# Altium PCB MB1137.PcbDoc (part 1 of 4)
Units mil, origin at the board's own origin, x right, y up, seen from the top; angles counter-clockwise.
Board outline 2760.94 x 5254.68 mil, 6 copper layers (Top Layer, GND, Signal, PWR, GND (Mid2), Bottom Layer), stack 74.545 mil thick; 293 components, 281 nets, 1134 pads, 921 vias.
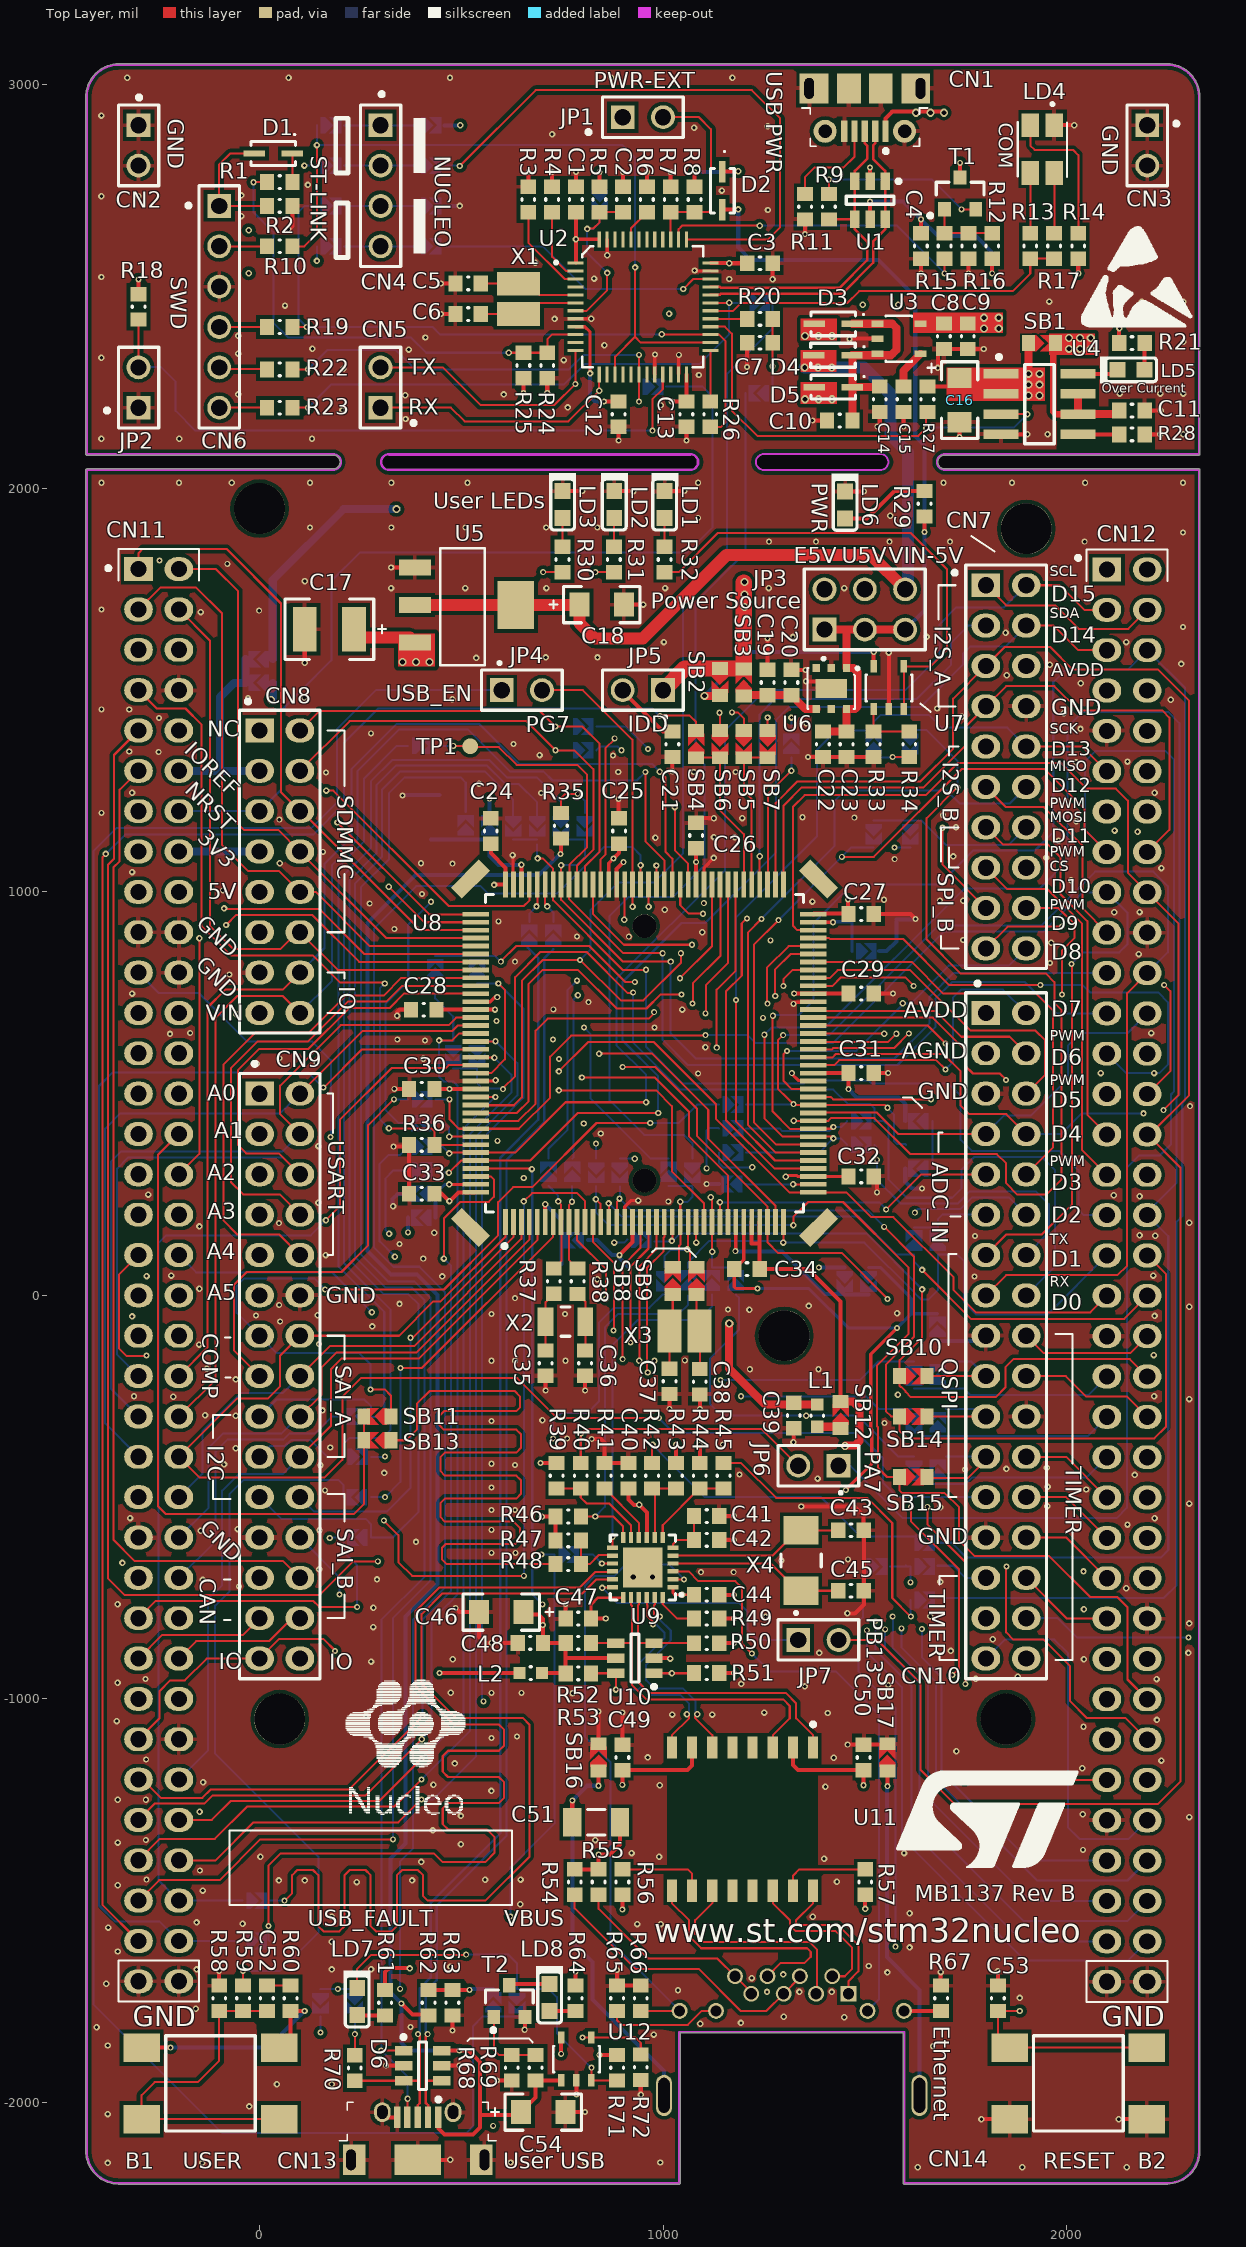
[diagram p0: Top Layer view]
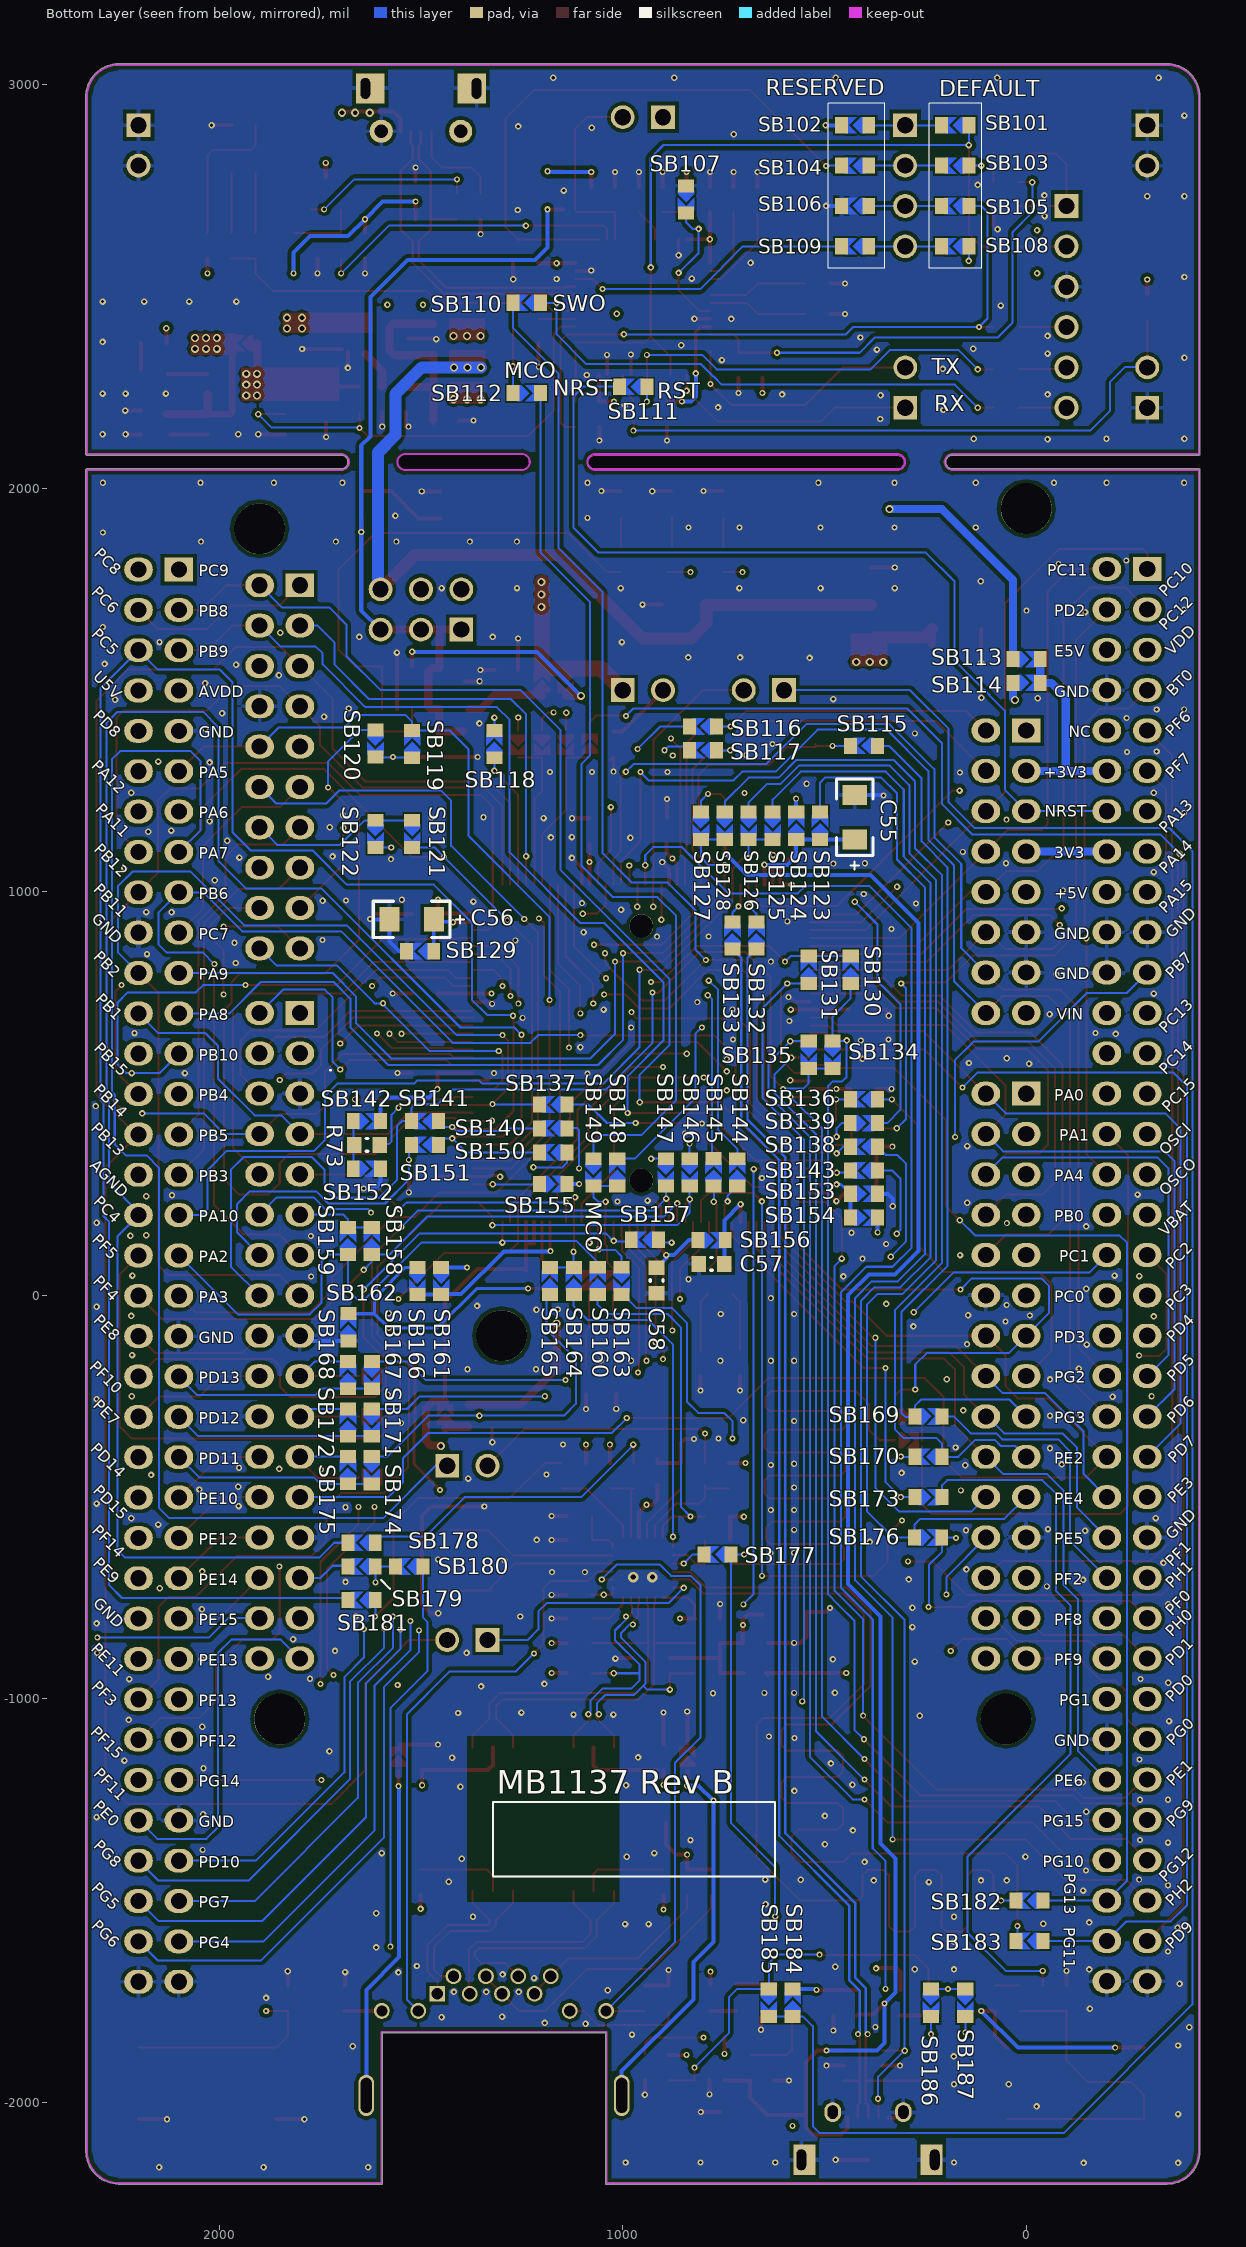
[diagram p1: Bottom Layer view, seen from below]
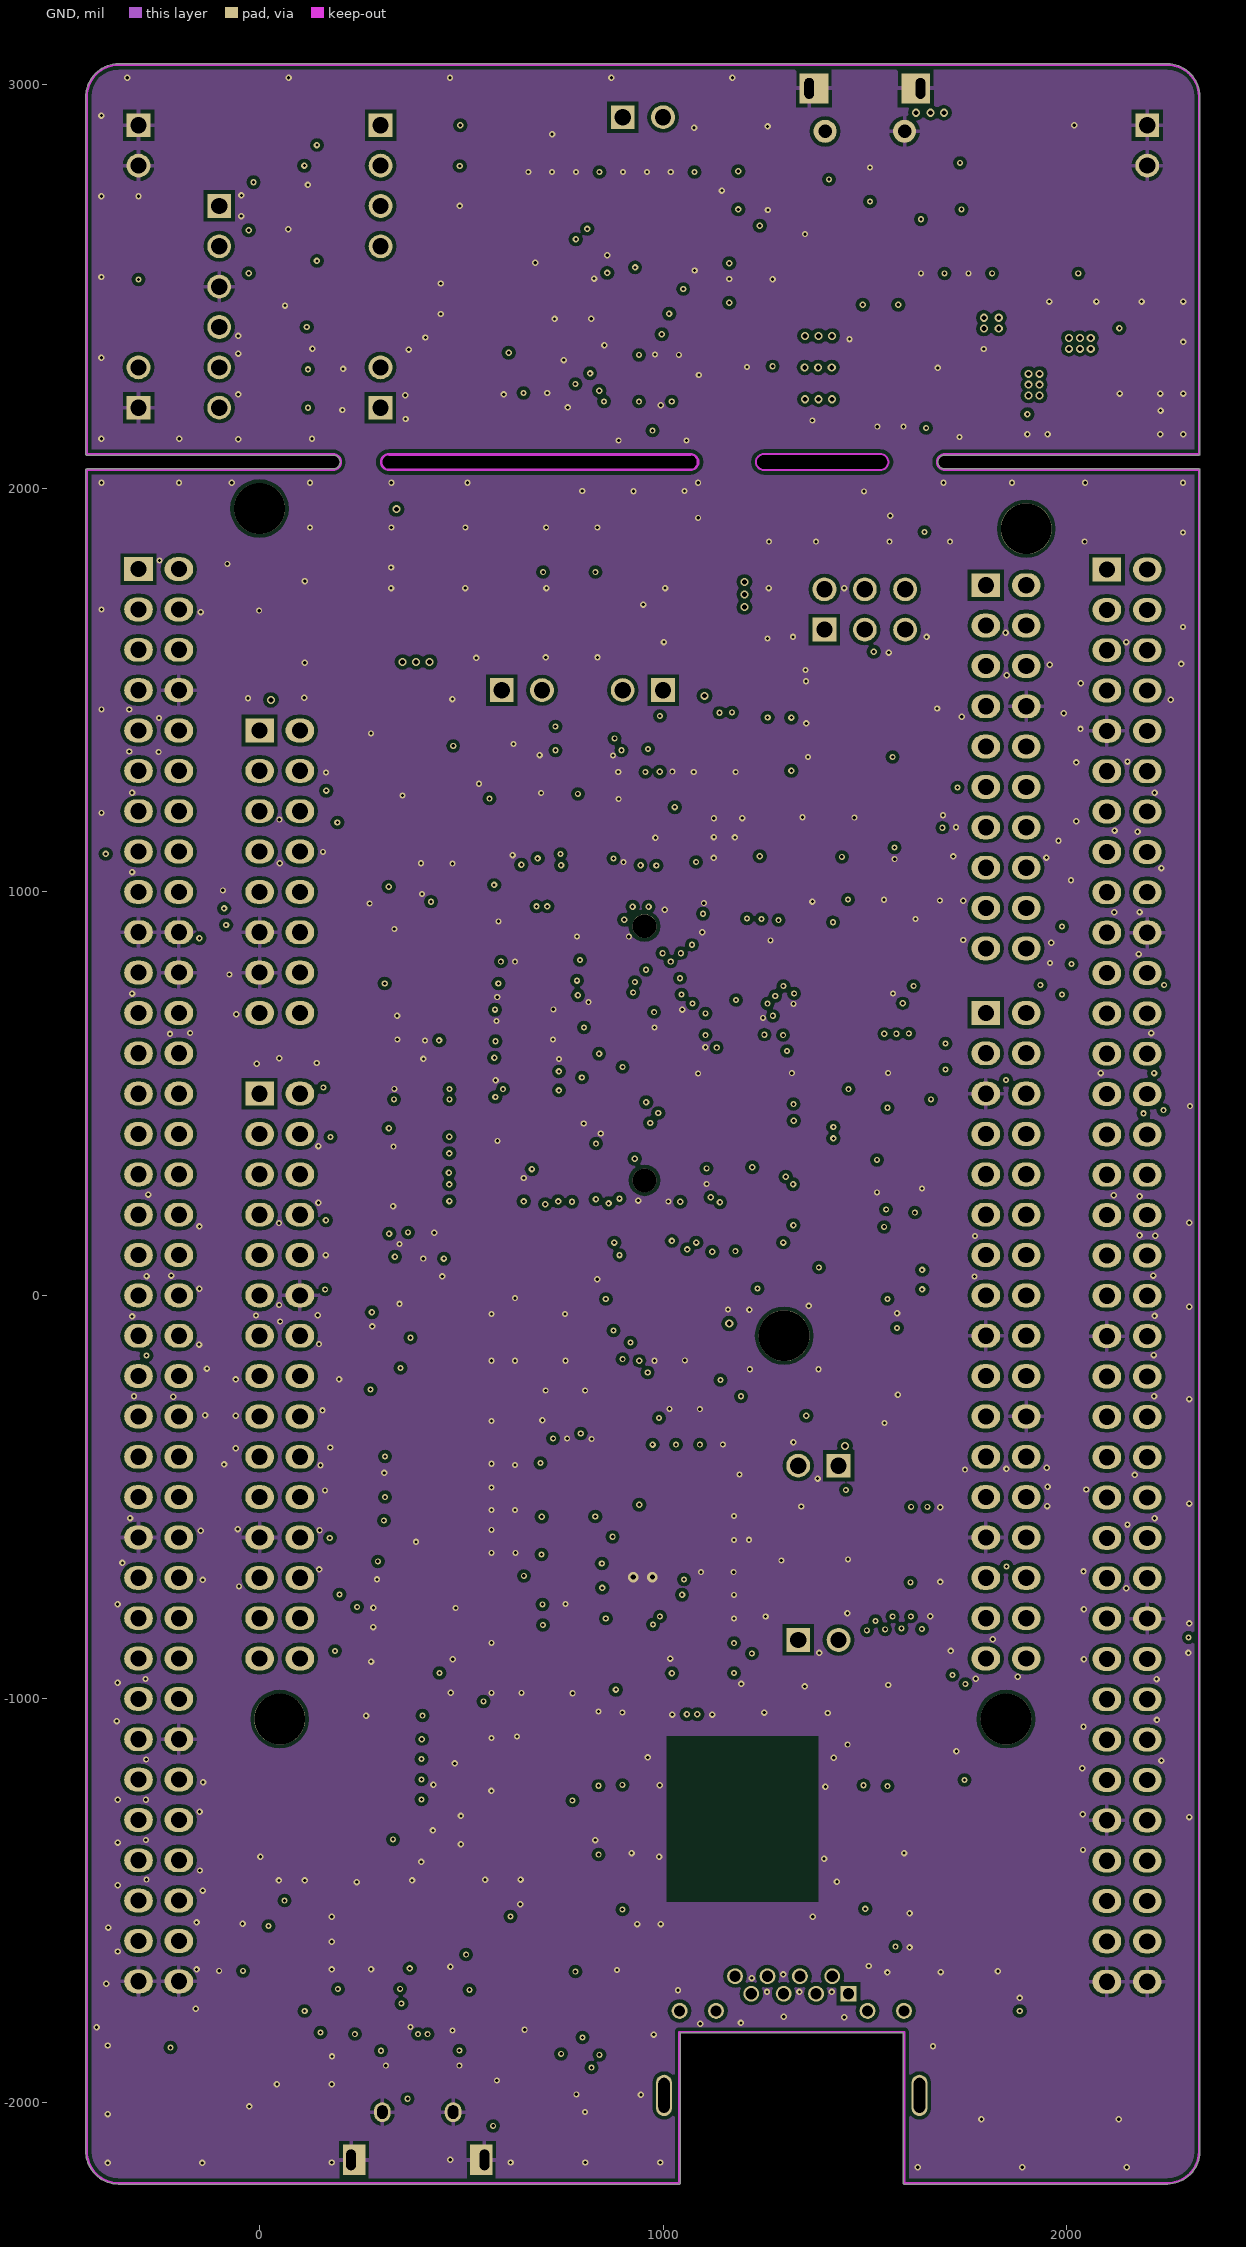
[diagram p2: GND]
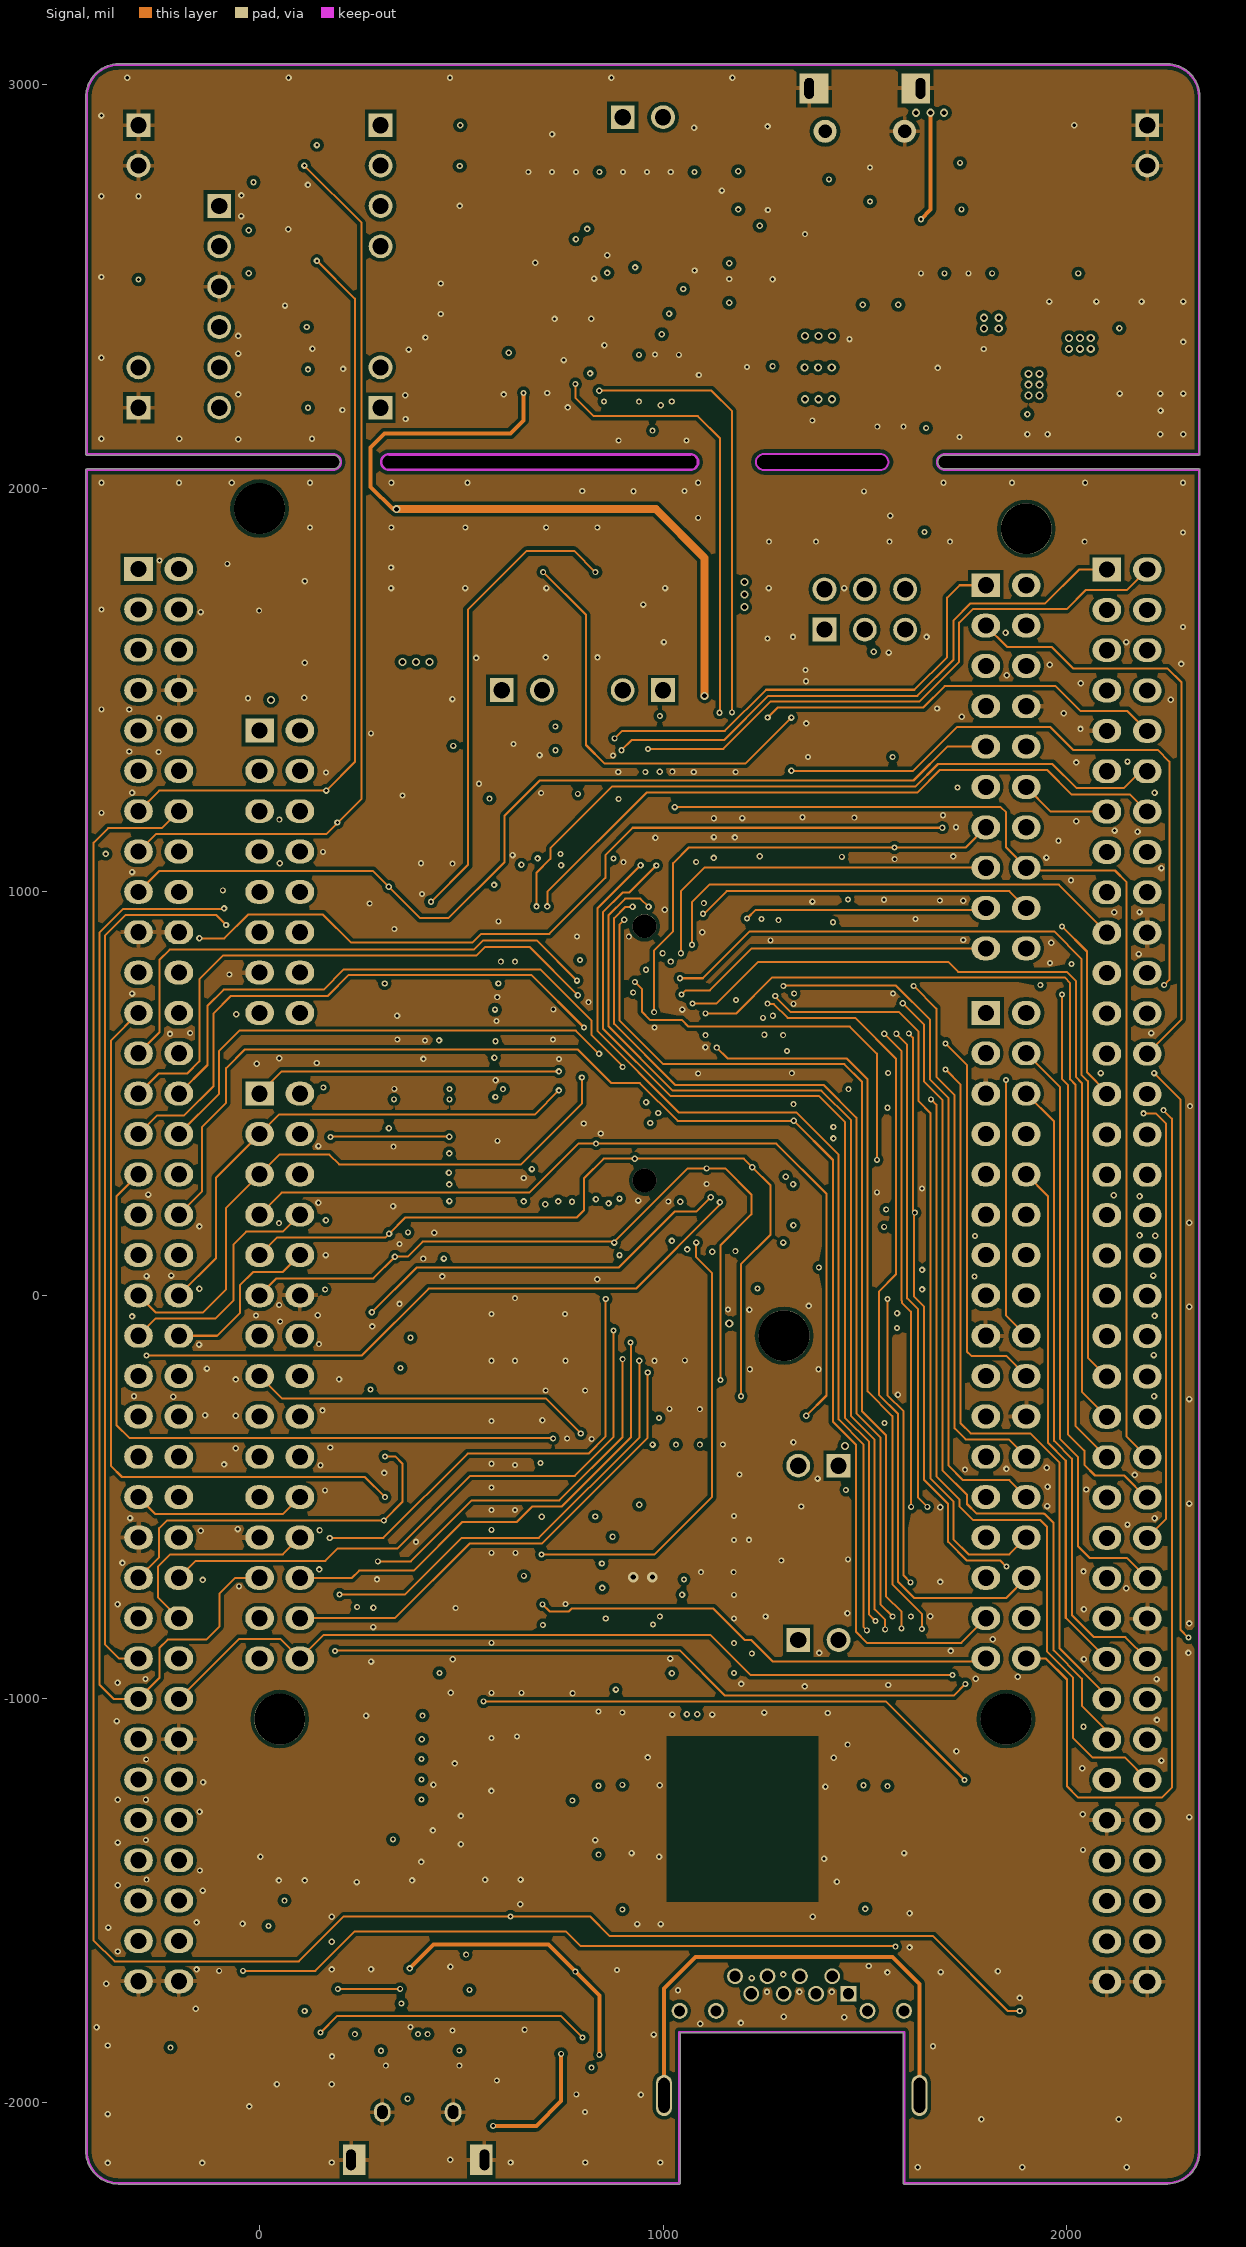
[diagram p3: Signal]
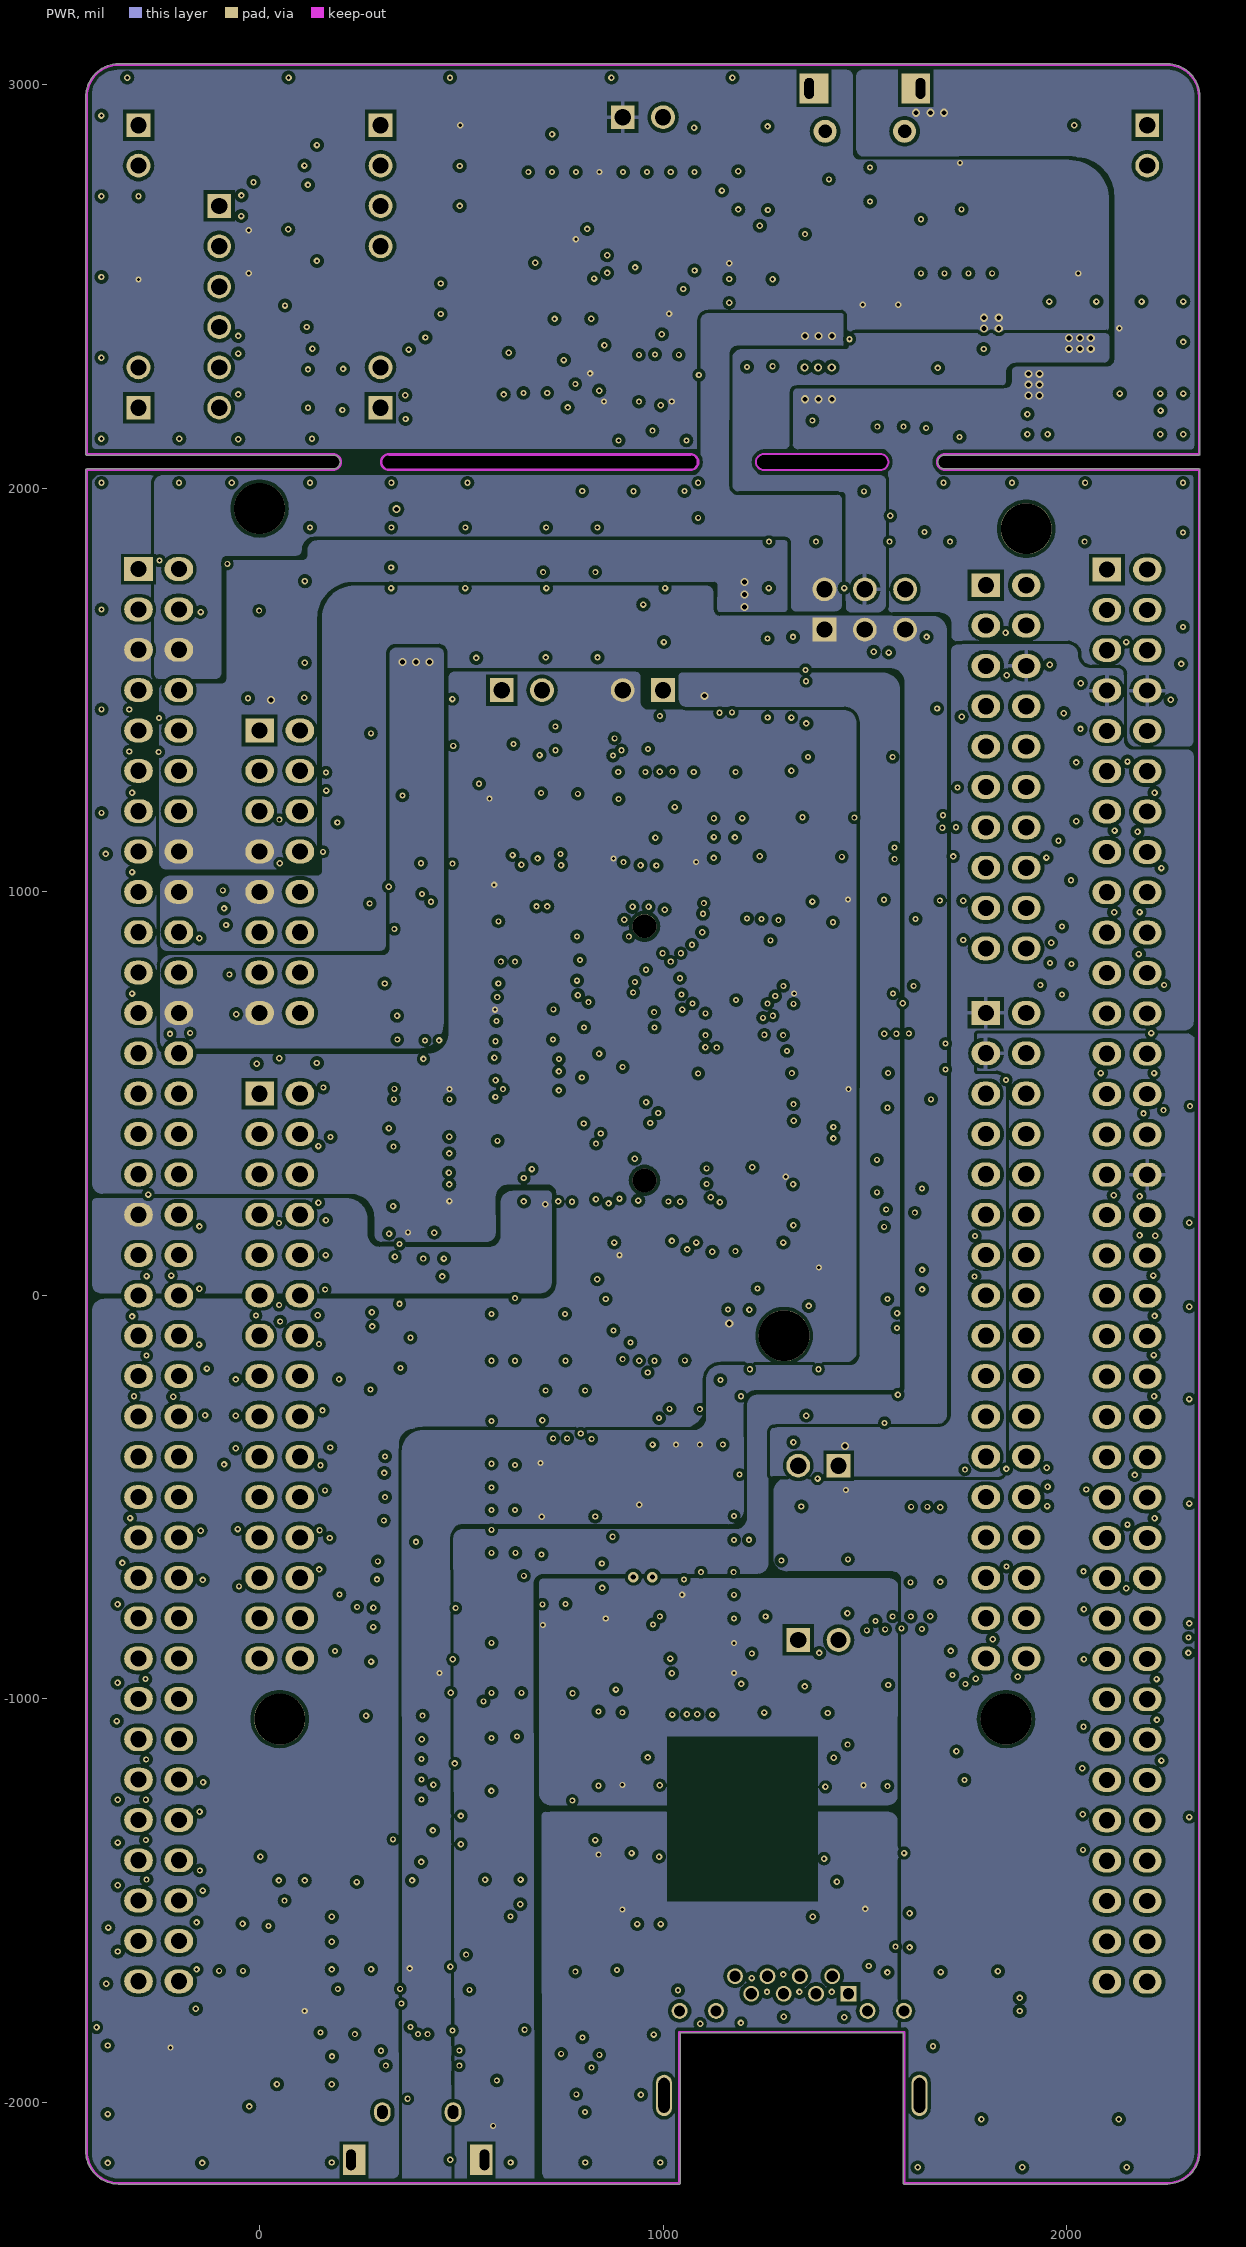
[diagram p4: PWR]
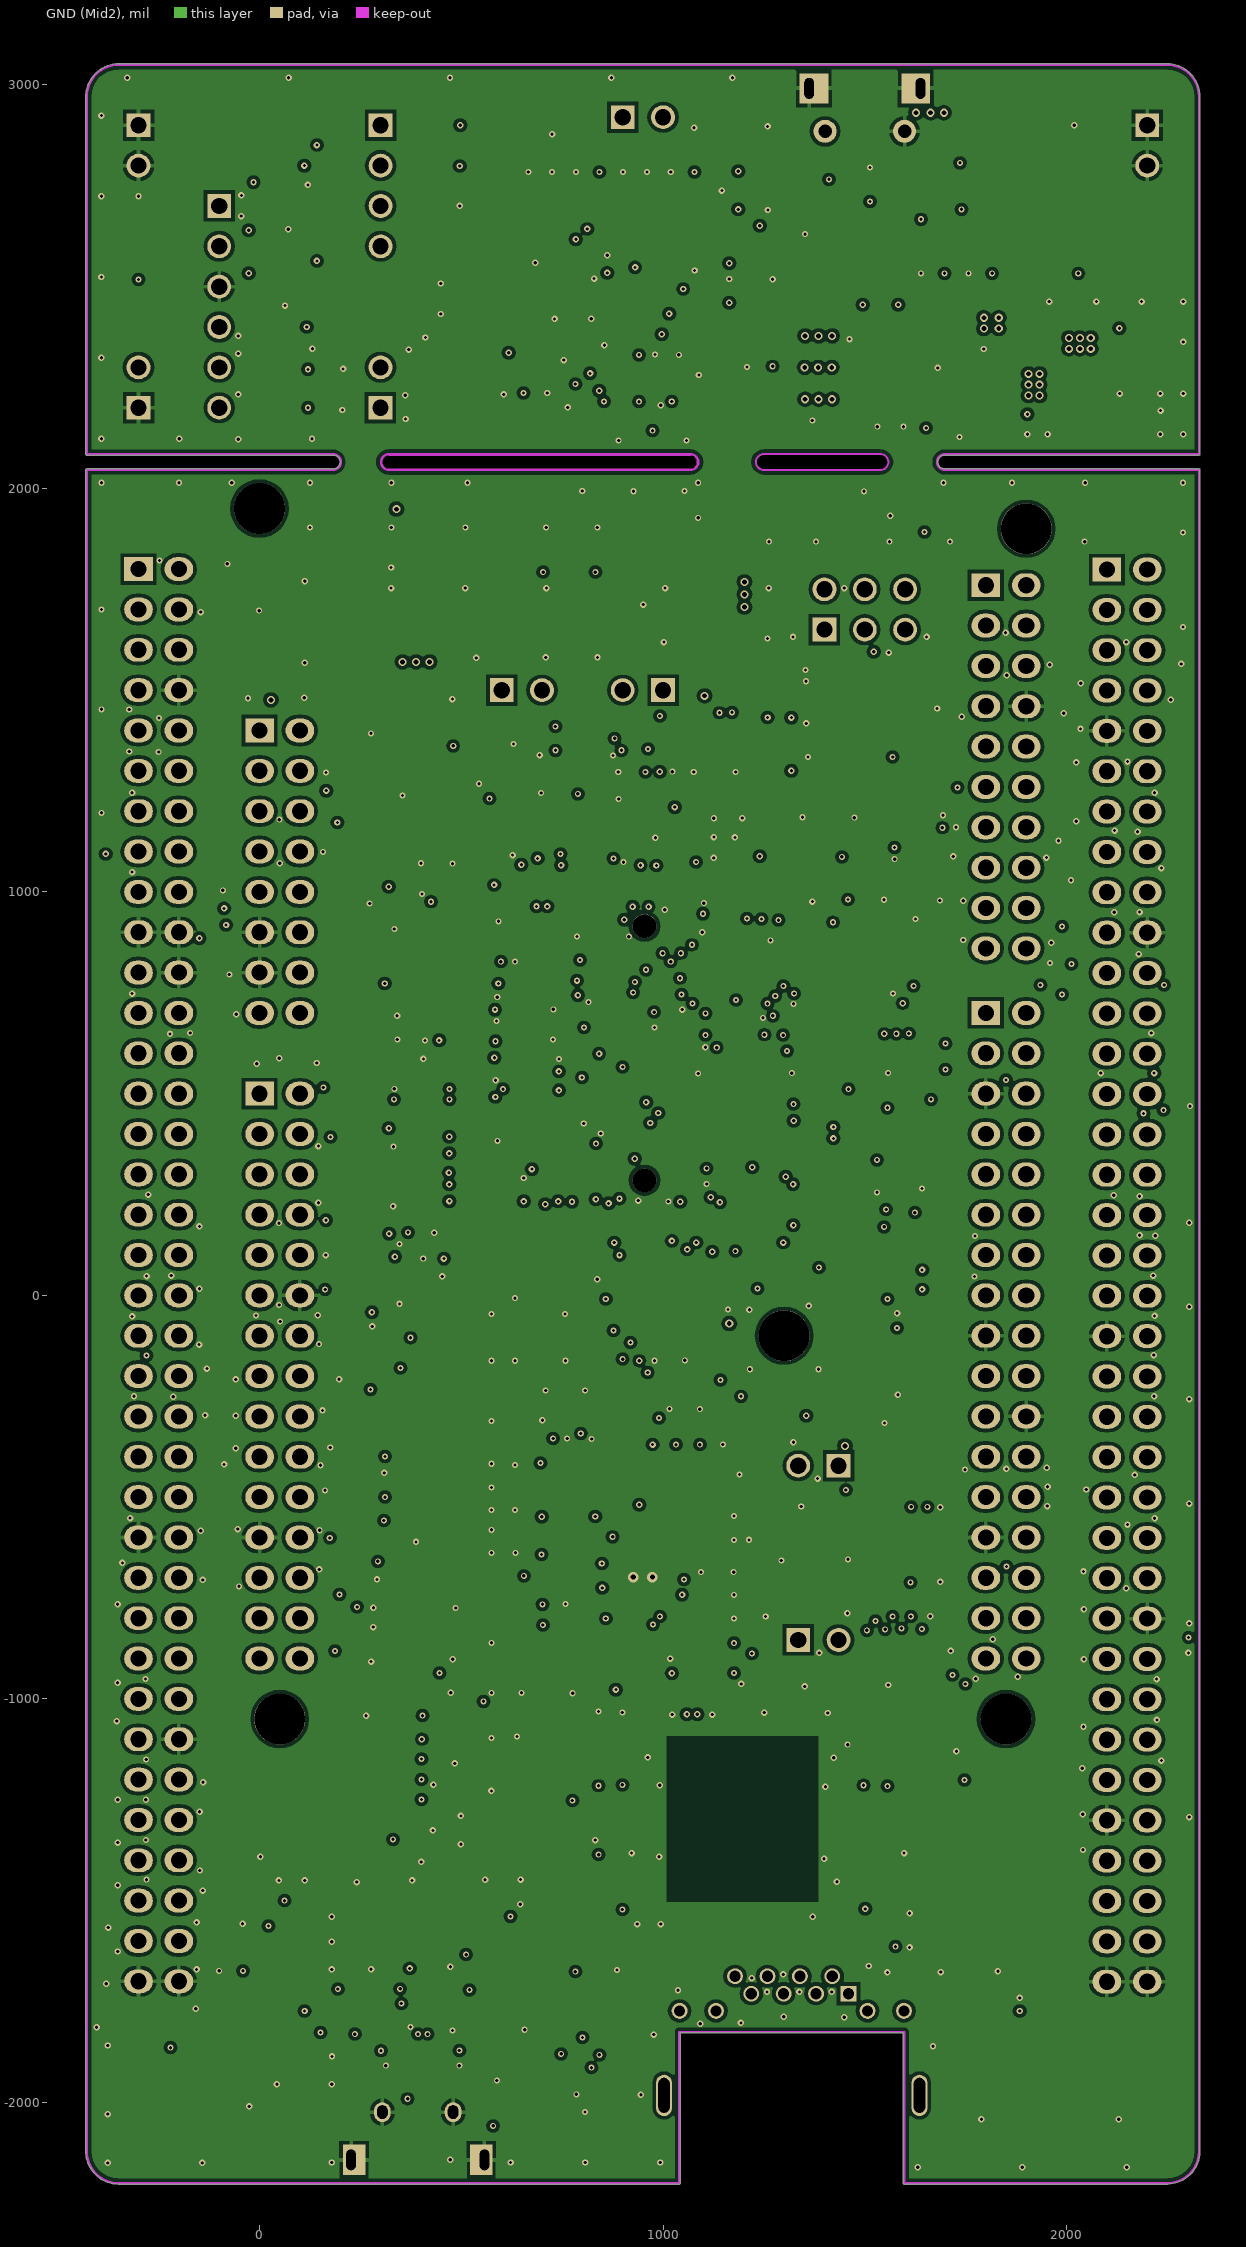
[diagram p5: GND (Mid2)]

## Layer stack, top to bottom
Top Layer: signal copper 1.4
Dielectric: core 15.748, FR-4, Dk 4.8
GND: signal copper 1.4
Dielectric: prepreg 9.4488, FR-4, Dk 4.8
Signal: signal copper 1.4
Dielectric: core 12.6, FR-4, Dk 4.8
PWR: signal copper 1.4
Dielectric: prepreg 12.6, FR-4, Dk 4.8
GND (Mid2): signal copper 1.4
Dielectric: core 15.748, FR-4, Dk 4.8
Bottom Layer: signal copper 1.4

## Board outline
-430.47,-2121.26 ccw(c-349.21,-2121.26) -349.85,-2202.51 ccw(c-349.37,-2200.04) -349.37,-2202.56 1040,-2202.56 ccw(c1040,-2200.04) 1042.52,-2200.04 1042.52,-1827.67 1595.49,-1827.67 1595.49,-2200.02 ccw(c1598,-2200.04) 1598,-2202.56 2249.06,-2202.56 ccw(c2249.06,-2200.04) 2250.06,-2202.35 ccw(c2249.06,-2121.1) 2330.31,-2122.14 ccw(c2327.95,-2121.26) 2330.47,-2121.26 2330.47,2045.67 ccw(c2327.95,2045.67) 2327.95,2048.18 1698.03,2048.18 cw(c1698.03,2045.67) 1698.05,2048.18 1698.03,2048.18 cw(c1698.03,2065.35) 1698.03,2082.52 2327.93,2082.52 ccw(c2327.95,2085.04) 2330.47,2085.04 2330.47,2970.87 ccw(c2327.95,2970.87) 2330.47,2970.89 cw(c2249.21,2970.87) 2330.47,2970.87 2330.47,2970.89 ccw(c2249.21,2970.87) 2249.24,3052.12 ccw(c2249.21,2970.87) 2249.21,3052.12 cw(c2249.21,3049.61) 2249.24,3052.12 2249.21,3052.12 -349.21,3052.12 ccw(c-349.21,3049.61) -349.24,3052.12 cw(c-349.21,2970.87) -349.21,3052.12 -349.24,3052.12 ccw(c-349.21,2970.87) -430.47,2970.87 -430.47,2085.04 ccw(c-427.95,2085.04) -427.95,2082.52 182.28,2082.52 cw(c182.28,2085.04) 182.26,2082.52 182.28,2082.52 cw(c182.28,2065.35) 199.45,2065.35 cw(c182.28,2065.35) 182.28,2048.18 -427.95,2048.18 ccw(c-427.95,2045.67) -430.47,2045.67
cut-out: 320.08,2048.18 320.1,2048.18 569.42,2048.18 1068.11,2048.18 cw(c1068.11,2045.67) 1068.13,2048.18 ccw(c1068.11,2065.35) 1085.28,2065.35 ccw(c1068.11,2065.35) 1068.11,2082.52 cw(c1068.11,2085.04) 1068.08,2082.52 1068.11,2082.52 569.42,2082.52 1068.08,2082.52 569.42,2082.52 320.08,2082.52 ccw(c320.08,2085.04) 320.1,2082.52 320.08,2082.52 569.42,2082.52 320.08,2082.52 ccw(c320.08,2065.35)
cut-out: 1250,2045.67 cw(c1250,2065.35) 1250,2085.04 1538.58,2085.04 cw(c1538.58,2065.35) 1538.58,2045.67

## Design rules (kind name [scope] priority, off if disabled: settings)
Clearance "U9 PWR TRACK" [(ObjectKind = 'Track') vs (ObjectKind = 'Pad') And (Component = 'U9')] p1: gap=8
Clearance "U8 PWR TRACK" [(ObjectKind = 'Track') vs (ObjectKind = 'Pad') And (Component = 'U8')] p2: gap=8
Clearance SB [(HasFootprint('SB_0603')) or (HasFootprint('JP2_SMD'))] p3: gap=5
Clearance CN1_PAD [(ObjectKind = 'Pad') And (Component = 'CN1') vs (ObjectKind = 'Pad') And (Component = 'CN1')] p4: gap=8
Clearance U6_PAD [(ObjectKind = 'Pad') And (Component = 'D6') vs (ObjectKind = 'Pad') And (Component = 'D6')] p5: gap=8
Clearance CN13_PAD [(ObjectKind = 'Pad') And (Component = 'CN13') vs (ObjectKind = 'Pad') And (Component = 'CN13')] p6: gap=7
Clearance U9_PAD [(ObjectKind = 'Pad') And (Component = 'U9') vs (ObjectKind = 'Pad') And (Component = 'U9')] p7: gap=8
Clearance U8_PAD [(ObjectKind = 'Pad') And (Component = 'U8') vs (ObjectKind = 'Pad') And (Component = 'U8')] p8: gap=7.8
Clearance Polygon [(ObjectKind = 'Poly')] p9: gap=10
Clearance [All] p10: gap=8.9
DiffPairsRouting [All] p1: maxlimit=10 minlimit=8.9 mostfreqgap=8.9 maxuncoupledlength=500
FabricationTestPointUsage TestPointUsage [All] p1: valid=0 allowmultiple=FALSE
FabricationTestpoint Testpoint [(IsPad And (OnTopLayer Or OnBottomLayer))] p1: side=3 testpointundercomponent=TRUE minsize=40 maxsize=100 preferedsize=60 minholesize=0 maxholesize=40 preferedholesize=32 testpointgrid=1 allowsidetop=TRUE allowsidebottom=TRUE usegrid=TRUE gridtolerance=0.01
HoleSize [All] p1: absolutevalues=TRUE maxlimit=150 minlimit=1 maxpercent=80.000 minpercent=20.000
MatchedLengths "Schematic Matched Net Lengths_3" [InNet('TD_P')] p1: tolerance=100 checknetsindiffpair=TRUE checkdiffpairvsdiffpair=TRUE checkothers=TRUE
MatchedLengths "Schematic Matched Net Lengths_2" [InNet('TD_N')] p2: tolerance=100 checknetsindiffpair=TRUE checkdiffpairvsdiffpair=TRUE checkothers=TRUE
MatchedLengths "Schematic Matched Net Lengths_1" [InNet('RD_P')] p3: tolerance=100 checknetsindiffpair=TRUE checkdiffpairvsdiffpair=TRUE checkothers=TRUE
MatchedLengths "Schematic Matched Net Lengths" [InNet('RD_N')] p4: tolerance=100 checknetsindiffpair=TRUE checkdiffpairvsdiffpair=TRUE checkothers=TRUE
MinimumSolderMaskSliver [All] p1: minsoldermaskwidth=0.5
PolygonConnect VBAT [(ObjectKind = 'Poly') And (Net = 'VBAT')] p1: connectstyle=Direct reliefconductorwidth=10 reliefentries=4 polygonreliefangle="90 Angle"
PolygonConnect VDD [(ObjectKind = 'Poly') And (Net = 'VDD')] p2: connectstyle=Direct reliefconductorwidth=10 reliefentries=4 polygonreliefangle="90 Angle"
PolygonConnect VIN [(ObjectKind = 'Poly') And (Net = 'VIN')] p3: connectstyle=Direct reliefconductorwidth=10 reliefentries=4 polygonreliefangle="90 Angle"
PolygonConnect +3V3 [(ObjectKind = 'Poly') And (Net = '+3V3')] p4: connectstyle=Direct reliefconductorwidth=10 reliefentries=4 polygonreliefangle="90 Angle"
PolygonConnect E5V [(ObjectKind = 'Poly') And (Net = 'E5V')] p5: connectstyle=Direct reliefconductorwidth=10 reliefentries=4 polygonreliefangle="90 Angle"
PolygonConnect +5V [(ObjectKind = 'Poly') And (Net = '+5V')] p6: connectstyle=Direct reliefconductorwidth=10 reliefentries=4 polygonreliefangle="90 Angle"
PolygonConnect U5V [(ObjectKind = 'Poly') And (Net = 'NetC17_2')] p7: connectstyle=Direct reliefconductorwidth=10 reliefentries=4 polygonreliefangle="90 Angle"
PolygonConnect VIA [IsVia] p8: connectstyle=Direct reliefconductorwidth=20 reliefentries=4 polygonreliefangle="90 Angle"
PolygonConnect [All] p9: connectstyle=Relief reliefconductorwidth=10 reliefentries=4 polygonreliefangle="90 Angle"
RoutingLayers [All] p1: top layer_v5=FALSE mid layer 1_v5=FALSE mid layer 2_v5=FALSE mid layer 3_v5=FALSE mid layer 4_v5=FALSE bottom layer_v5=FALSE
RoutingVias [All] p1: holewidth=12 width=20 viastyle="Through Hole" minholewidth=8 minwidth=15 maxholewidth=28 maxwidth=50
SilkToSilkClearance [All] p1: silktosilkclearance=4
SilkscreenOverComponentPads [IsPad] p1: minsilkscreentomaskgap=4
SolderMaskExpansion [All] p1: expansion=4
Width PWR [InNetClass('PWR')] p1: maxlimit=100 minlimit=8 preferedwidth=10 midlayer1_minwidth=10 midlayer2_minwidth=10 midlayer3_minwidth=10 midlayer4_minwidth=10 bottomlayer_minwidth=10 minimp=50.000000 maximp=50.000000 favimp=50.000000
Width [All] p2: maxlimit=100 minlimit=5 preferedwidth=5 minimp=50.000000 maximp=50.000000 favimp=50.000000
20 further rules are at their usual default settings.

## Classes and differential pairs
component class U_USB: C54 CN13 D6 LD7 LD8 R61 R62 R63 R64 R68 R69 R70 R71 R72 R76 SB184 SB185 SB186 SB187 T2 U12
component class U_Ethernet: C40 C41 C42 C43 C44 C45 C46 C47 C48 C49 C50 C51 CN14 L2 R39 R40 R41 R42 R43 R44 R45 R46 R47 R48 R49 R50 R51 R52 R53 R54 R55 R56 R57 R65 R66 R67 SB16 SB17 SB177 U9 U10 U11 X4
component class U_MCU_144: B1 B2 C21 C24 C25 C26 C27 C28 C29 C30 C31 C32 C33 C34 C35 C36 C37 C38 C39 C52 C53 C55 C56 C57 C58 JP4 JP6 JP7 L1 LD2 LD3 R30 R31 R35 R36 R37 R38 R58 R59 R60 R73 SB5 SB6 SB8 SB9 SB12 SB13 SB118 SB123 SB124 SB125 SB127 SB129 SB132 SB133 SB139 SB142 SB149 SB152 SB153 SB154 SB155 SB156 SB160 SB161 SB162 SB164 SB166 SB173 SB178 SB180 SB181 SB182 SB183 TP1 U8 X2 X3
component class MB1137: C11 C16 C17 C18 C19 C20 C22 C23 JP3 JP5 LD5 LD6 R21 R27 R28 R29 SB1 SB2 SB3 U4 U5 U6
net class PH[0..2]: PH0 PH1 PH2
net class PG[0..15]: PG0 PG1 PG2 PG3 PG4 PG5 PG6 PG7 PG8 PG9 PG10 PG11 PG12 PG13 PG14 PG15
net class PF[0..15]: PF0 PF1 PF2 PF3 PF4 PF5 PF6 PF7 PF8 PF9 PF10 PF11 PF12 PF13 PF14 PF15
net class PE[0..15]: PE0 PE1 PE2 PE3 PE4 PE5 PE6 PE7 PE8 PE9 PE10 PE11 PE12 PE13 PE14 PE15
net class PD[0..15]: PD0 PD1 PD2 PD3 PD4 PD5 PD6 PD7 PD8 PD9 PD10 PD11 PD12 PD13 PD14 PD15
net class PA[0..15]: PA0 PA1 PA2 PA3 PA4 PA5 PA6 PA7 PA8 PA9 PA10 PA11 PA12 PA13 PA14 PA15
net class PB[0..15]: PB0 PB1 PB2 PB3 PB4 PB5 PB6 PB7 PB8 PB9 PB10 PB11 PB12 PB13 PB14 PB15
net class PC[0..15]: PC0 PC1 PC2 PC3 PC4 PC5 PC6 PC7 PC8 PC9 PC10 PC11 PC12 PC13 PC14 PC15
component class U_ST_LINK_V2-1: C1 C2 C3 C4 C5 C6 C7 C8 C9 C10 C12 C13 C14 C15 CN1 CN2 CN3 CN4 CN5 CN6 D1 D2 D3 D4 D5 JP1 JP2 LD4 R1 R2 R3 R4 R5 R6 R7 R8 R9 R10 R11 R12 R13 R14 R15 R16 R17 R18 R19 R20 R22 R23 R24 R25 R26 SB101 SB102 SB103 SB104 SB105 SB106 SB107 SB108 SB109 SB110 SB111 SB112 T1 U1 U2 U3 X1
component class U_Connectors: CN7 CN8 CN9 CN10 CN11 CN12 LD1 R32 R33 R34 SB4 SB7 SB10 SB11 SB14 SB15 SB113 SB114 SB115 SB116 SB117 SB119 SB120 SB121 SB122 SB126 SB128 SB130 SB131 SB134 SB135 SB136 SB137 SB138 SB140 SB141 SB143 SB144 SB145 SB146 SB147 SB148 SB150 SB151 SB157 SB158 SB159 SB163 SB165 SB167 SB168 SB169 SB170 SB171 SB172 SB174 SB175 SB176 SB179 U7
differential pair TD: +TD_P -TD_N
differential pair RD: +RD_P -RD_N
differential pair NewDifferentialPair1: +NetCN13_3 -NetCN12_2
differential pair NewDifferentialPair2: +NetCN13_2 -NetCN13_3

## Components (designator, comment, footprint, x,y, rotation, side; value= is the part's Value field where it differs from the comment)
B1 "USER (Blue)" PB-6X6mm-Blue -122,-1953 r180 top
B2 "TD-0341 [RESET/Black]" PB-6X6mm-Black 2029,-1953 r180 top
C1 "100nF" 0603C 784,2716 r270 top
C2 "100nF" 0603C 901,2716 r270 top
C3 "100nF" 0603C 1240,2558 r180 top
C4 "100nF" 0603C 1639,2601 r90 top
C5 "10pF" 0603C 517,2508 r180 top
C6 "10pF" 0603C 517,2432 r180 top
C7 "20pF[N/A]" 0603C 1240,2361 r180 top
C8 "100nF" 0603C 1696,2377 r90 top locked
C9 "1uF_X5R_0603" 0603C 1755,2377 r270 top
C10 "100nF" 0603C 1438,2168 r0 top
C11 "100nF" 0603C 2162,2193 r180 top
C12 "100nF" 0603C 890,2184 r90 top
C13 "100nF" 0603C 1058,2184 r90 top
C14 "1uF_X5R_0603" 0603C 1537,2221 r90 top
C15 "10nF_X7R_0603" 0603C 1596,2221 r90 top
C16 "4.7uF" TAN-A 1735,2219 r90 top
C17 "10uF(25V)" TAN-B 173,1651 r0 top
C18 "10uF" TAN-A 848,1712 r180 top
C19 "100nF" 0603C 1259,1519 r270 top
C20 "1uF_X5R_0603" 0603C 1318,1519 r90 top
C21 "4.7uF_X5R_0603" 0603C 1023,1366 r270 top
C22 "100nF" 0603C 1396,1366 r90 top
C23 "1uF_X5R_0603" 0603C 1455,1366 r270 top
C24 "100nF" 0603C 573,1151 r90 top
C25 "100nF" 0603C 891,1151 r90 top
C26 "100nF" 0603C 1082,1140 r90 top
C27 "100nF" 0603C 1491,945 r0 top
C28 "100nF" 0603C 407,708 r180 top
C29 "100nF" 0603C 1491,748 r0 top
C30 "100nF" 0603C 402,512 r180 top
C31 "100nF" 0603C 1491,551 r0 top
C32 "100nF" 0603C 1491,295 r0 top
C33 "100nF" 0603C 402,252 r180 top
C34 "100nF" 0603C 1208,65 r180 top
C35 "2pF" 0603C 709,-168 r270 top
C36 "2pF" 0603C 807,-168 r270 top
C37 "4.3pF[N/A]" 0603C 1016,-213 r270 top
C38 "4.3pF[N/A]" 0603C 1091,-214 r270 top
C39 "100nF" 0603C 1324,-297.4 r270 top
C40 "100nF" 0603C 914,-447 r270 top
C41 "1uF_X5R_0603" 0603C 1108,-547 r0 top
C42 "470pF" 0603C 1108,-606 r180 top
C43 "30pF" 0603C 1466,-582 r0 top
C44 "100nF" 0603C 1108,-742 r180 top
C45 "30pF" 0603C 1466,-732 r0 top
C46 "10uF" TAN-A 599,-785 r0 top
C47 "100nF" 0603C 790,-801 r0 top
C48 "100nF" 0603C 671,-861 r0 top
C49 "100nF" 0603C 899,-1145 r270 top
C50 "100nF" 0603C 1497,-1145 r270 top
C51 "TC1206KKX7RDBB102" 1206C 834,-1306 r0 top
C52 "[N/A]" 0603C 18,-1742 r270 top
C53 "100nF" 0603C 1830,-1742 r270 top
C54 "4.7uF" TAN-A 703,-2024 r180 top
C55 "2.2uF_X7R" TAN-A 425,1185 r270 bottom
C56 "2.2uF_X7R" TAN-A 1523,932 r180 bottom
C57 "1uF_X5R_0603" 0603C 779.7,78 r0 bottom
C58 "100nF" 0603C 916,37 r270 bottom
CN1 "1050170001" Molex_1050170001 1500,2885 r180 top locked
CN2 "" HDR_1x2_2R54_V_M -300,2900 r270 top locked
CN3 "" HDR_1x2_2R54_V_M 2200,2900 r270 top locked
CN4 "Header 4" HDR_1x4_2R54_V_M 300,2900 r270 top locked
CN5 "" HDR_1x2_2R54_V_M_S 299.69,2200 r90 top locked
CN6 "Header 6X1" HDR_1x6_2R54_V_M -100,2700 r270 top locked
CN7 "Header 10X2_Female" HDR_10x2_2R54_V_F 1800,1760 r270 top locked
CN8 "Header 8X2_Female" HDR_8x2_2R54_V_F 0,1400 r270 top locked
CN9 "Header 15X2_Female" HDR_15x2_2R54_V_F 0,500 r270 top locked
CN10 "Header 17X2_Female" HDR_17x2_2R54_V_F 1800,700 r270 top locked
CN11 "Header 36X2" HDR_2x36_2R54_V_M -300,1800 r270 top locked
CN12 "Header 36X2" HDR_2x36_2R54_V_M 2100,1799 r270 top locked
CN13 "475900001" MOLEX_47590001 392,-2037 r0 top locked
CN14 "KRJ-CB4.2GYZNL" RJ45_KRJ-CB4.2GYZNL 1319,-1835 r0 top locked
D1 "BAT60JFILM" SOD-323 34,2830 r0 top
D2 "BAT60JFILM" SOD-323 1147,2738 r90 top
D3 "BAT60JFILM" SOD-323 1422,2408 r0 top
D4 "BAT60JFILM" SOD-323 1421,2330 r0 top
D5 "BAT60JFILM" SOD-323 1422,2251 r0 top
D6 "ESDA6V1BC6" SOT23-6L 404,-1909 r0 top
JP1 "" HDR_1x2_2R54_V_M_S 900,2920 r0 top locked
JP2 "" HDR_1x2_2R54_V_M_S -300,2200 r90 top locked
JP3 "Header 3X2" HDR_3x2_2R54_V_M 1400,1650 r0 top locked
JP4 "" HDR_1x2_2R54_V_M_S 600,1500 r0 top locked
JP5 "" HDR_1x2_2R54_V_M_S 1000,1500 r180 top
JP6 "" HDR_1x2_2R54_V_M_S 1435,-422 r180 top
JP7 "" HDR_1x2_2R54_V_M_S 1335,-854 r0 top
L1 "BEAD" 0603L 1382,-298 r90 top
L2 "BEAD" 0603L 672,-936 r0 top
LD1 "Green" 0603D-G 1004,1960 r270 top
LD2 "Blue" 0603D-B 879,1960 r270 top
LD3 "Red" 0603D-R 751,1960 r270 top
LD4 "LD_BICOLOR_CMS" HSMF-A201 1940,2841 r270 top
LD5 "Red" 0603D-R 2160,2294 r0 top
LD6 "Green" 0603D-G 1451.04,1959.33 r270 top
LD7 "Red" 0603D-R 242,-1750 r270 top
LD8 "Green" 0603D-G 719.01,-1740 r270 top
R1 "100[N/A]" 0603R 50,2759 r180 top
R2 "10K" 0603R 50,2700 r0 top
R3 "10K[N/A]" 0603R 666,2716 r270 top
R4 "10K" 0603R 725,2716 r270 top
R5 "100K" 0603R 842,2716 r90 top
R6 "100K" 0603R 960,2716 r270 top
R7 "4K7" 0603R 1019,2716 r90 top
R8 "2K7" 0603R 1078,2716 r270 top locked
R9 "1K5" 0603R 1411,2698 r90 top
R10 "22" 0603R 50,2600 r0 top
R11 "100K" 0603R 1352,2698 r270 top
R12 "10K" 0603R 1815.7,2601 r270 top
R13 "100" 0603R 1910,2601 r90 top
R14 "0" 0603R 2029,2601 r270 top
R15 "100" 0603R 1697.7,2601 r270 top
R16 "36K" 0603R 1756.7,2601 r90 top
R17 "100" 0603R 1969,2601 r90 top
R18 "[N/A]" 0603R -300,2450 r270 top
R19 "22" 0603R 50,2400 r0 top
R20 "100" 0603R 1240,2420 r0 top
R21 "1K" 0603R 2162,2360 r0 top
R22 "22" 0603R 50,2295 r0 top
R23 "22" 0603R 50,2200 r0 top
R24 "4K7" 0603R 713,2304.7 r90 top
R25 "4K7" 0603R 654,2304.7 r90 top
R26 "100" 0603R 1117,2184 r270 top
R27 "10K" 0603R 1655,2221 r270 top
R28 "2K7" 0603R 2162,2134 r180 top
R29 "1K" 0603R 1648,1962 r270 top
R30 "1K" 0603R 750.75,1823.97 r90 top
R31 "680" 0603R 878,1824 r90 top
R32 "510" 0603R 1004,1824 r90 top
R33 "200K" 0603R 1522,1366 r270 top
R34 "10K" 0603R 1610,1366 r270 top
R35 "10K" 0603R 747,1164 r90 top
R36 "10K" 0603R 402,373 r180 top
R37 "0" 0603R 729,35.25 r90 top
R38 "0" 0603R 788,35 r90 top
R39 "10K" 0603R 736,-447 r270 top
R40 "33" 0603R 796.01,-447 r90 top
R41 "10K" 0603R 855,-447 r90 top
R42 "33" 0603R 973,-447 r90 top
R43 "10K" 0603R 1032,-447 r270 top
R44 "10K" 0603R 1091,-447 r270 top
R45 "33" 0603R 1150,-447 r90 top
R46 "1K5" 0603R 765,-548 r180 top
R47 "10K" 0603R 765,-607 r0 top
R48 "33" 0603R 765,-666 r180 top
R49 "12K1" 0603R 1108,-801 r0 top
R50 "50" 0603R 1108,-862 r0 top
R51 "50" 0603R 1108,-936 r0 top
R52 "50" 0603R 790,-861 r180 top
R53 "50" 0603R 790,-937 r180 top
R54 "75" 0603R 781,-1454 r270 top
R55 "75" 0603R 840.33,-1454 r270 top
R56 "75" 0603R 899,-1454 r90 top
R57 "75" 0603R 1501,-1454 r90 top
R58 "220K" 0603R -100,-1742 r90 top
R59 "330" 0603R -41,-1742 r90 top
R60 "100" 0603R 77,-1742 r90 top
R61 "620" 0603R 311,-1753 r90 top
R62 "430K" 0603R 419,-1753 r90 top
R63 "620K" 0603R 478,-1753 r270 top
R64 "330" 0603R 783.01,-1742 r90 top
R65 "270" 0603R 886,-1742 r90 top
R66 "10K" 0603R 944.68,-1742 r90 top
R67 "270" 0603R 1689,-1742 r90 top
R68 "47K" 0603R 684,-1914 r90 top
R69 "22K" 0603R 625,-1914 r90 top
R70 "1K5" 0603R 236,-1915 r90 top
R71 "47K" 0603R 886,-1914 r270 top
R72 "10K" 0603R 944.68,-1913 r90 top
R73 "100K" 0603R 1634,373 r0 bottom
SB1 "Open" SB_0603 1939,2360 r180 top
SB2 "Closed" SB_0603 1141,1520 r90 top locked
SB3 "Closed" SB_0603 1200,1519 r270 top
SB4 "Closed" SB_0603 1082,1366.25 r270 top
SB5 "Closed" SB_0603 1200,1366.25 r90 top
SB6 "Closed" SB_0603 1141,1366.25 r90 top
SB7 "Closed" SB_0603 1259,1366.25 r90 top
SB8 "Open" SB_0603 1024,36 r270 top locked
SB9 "Open" SB_0603 1083,36 r270 top locked
SB10 "Circuit Breaker" SB_0603 1620,-200 r180 top
SB11 "Circuit Breaker" SB_0603 292,-299.97 r0 top
SB12 "Closed" SB_0603 1440,-296.55 r270 top
SB13 "Closed" SB_0603 292,-359 r0 top
SB14 "Circuit Breaker" SB_0603 1620,-300 r180 top
SB15 "Circuit Breaker" SB_0603 1620,-450 r180 top
SB16 "Open" SB_0603 840,-1145 r270 top
SB17 "Open" SB_0603 1556,-1145 r270 top
SB101 "Closed" SB_0603 176,2900 r180 bottom
SB102 "Open" SB_0603 424,2900 r180 bottom
SB103 "Closed" SB_0603 176,2800 r180 bottom
SB104 "Open" SB_0603 424,2800 r180 bottom
SB105 "Closed" SB_0603 176,2700 r180 bottom
SB106 "Open" SB_0603 424,2700 r180 bottom
SB107 "Open" SB_0603 843,2716 r90 bottom
SB108 "Closed" SB_0603 176,2600 r180 bottom
SB109 "Open" SB_0603 424,2600 r180 bottom
SB110 "Closed" SB_0603 1238,2460 r180 bottom
SB111 "Closed" SB_0603 974,2252 r180 bottom
SB112 "Closed" SB_0603 1238,2236 r0 bottom
SB113 "Open" SB_0603 -1,1577 r0 bottom locked
SB114 "Closed" SB_0603 -1,1518 r0 bottom locked
SB115 "Circuit Breaker" SB_0603 402,1362 r180 bottom
SB116 "Closed" SB_0603 801,1410 r180 bottom
SB117 "Closed" SB_0603 801,1351 r180 bottom
SB118 "Closed" SB_0603 1318,1366.25 r270 bottom
SB119 "Open" SB_0603 1522,1366.25 r270 bottom locked
SB120 "Closed" SB_0603 1612.75,1368 r90 bottom
SB121 "Closed" SB_0603 1522,1143.75 r90 bottom
SB122 "Open" SB_0603 1612.75,1143.75 r90 bottom
SB123 "Circuit Breaker" SB_0603 511,1164 r270 bottom
SB124 "Circuit Breaker" SB_0603 570,1164 r270 bottom
SB125 "Circuit Breaker" SB_0603 628.42,1164 r90 bottom
SB126 "Circuit Breaker" SB_0603 688,1164 r90 bottom
SB127 "Circuit Breaker" SB_0603 806,1164 r90 bottom
SB128 "Circuit Breaker" SB_0603 747,1164 r90 bottom
SB129 "Circuit Breaker" SB_0603 1502,853 r180 bottom
SB130 "Circuit Breaker" SB_0603 435,807 r270 bottom
SB131 "Circuit Breaker" SB_0603 539,807 r270 bottom
SB132 "Closed" SB_0603 668.57,891.75 r270 bottom
SB133 "Closed" SB_0603 728,891.75 r270 bottom
SB134 "Circuit Breaker" SB_0603 480,596.25 r90 bottom
SB135 "Circuit Breaker" SB_0603 539,596.25 r90 bottom
SB136 "Circuit Breaker" SB_0603 402,486 r180 bottom
SB137 "Circuit Breaker" SB_0603 1172,473 r180 bottom
SB138 "Open" SB_0603 402,368.5 r180 bottom
SB139 "Closed" SB_0603 402.25,427 r0 bottom
SB140 "Circuit Breaker" SB_0603 1172,414 r180 bottom
SB141 "Circuit Breaker" SB_0603 1490,432 r180 bottom
SB142 "Open" SB_0603 1634,432 r0 bottom locked
SB143 "Open" SB_0603 402,309.5 r180 bottom
SB144 "Open" SB_0603 716,305 r270 bottom
SB145 "Open" SB_0603 775,305.25 r270 bottom
SB146 "Circuit Breaker" SB_0603 834,305 r90 bottom
SB147 "Circuit Breaker" SB_0603 893,305 r90 bottom
SB148 "Open" SB_0603 1013.7,305 r270 bottom
SB149 "Closed" SB_0603 1072.7,305 r90 bottom
SB150 "Circuit Breaker" SB_0603 1172,354 r180 bottom
SB151 "Circuit Breaker" SB_0603 1490,373 r180 bottom
SB152 "Open" SB_0603 1634,314 r0 bottom locked
SB153 "Circuit Breaker" SB_0603 401.94,251.83 r0 bottom
SB154 "Circuit Breaker" SB_0603 401.94,192.83 r0 bottom
SB155 "Closed" SB_0603 1172,276 r0 bottom
SB156 "Closed" SB_0603 779.7,137 r0 bottom
SB157 "Circuit Breaker" SB_0603 945,138 r180 bottom
SB158 "Circuit Breaker" SB_0603 1622,135 r270 bottom
SB159 "Circuit Breaker" SB_0603 1681,135 r270 bottom
SB160 "Closed" SB_0603 1062,36 r270 bottom
SB161 "Circuit Breaker" SB_0603 1450,35.7 r90 bottom
SB162 "Closed" SB_0603 1680,-79 r270 bottom
SB163 "Closed" SB_0603 1003,36 r90 bottom locked
SB164 "Closed" SB_0603 1121,35.81 r270 bottom
SB165 "Circuit Breaker" SB_0603 1180.53,35.81 r270 bottom
SB166 "Circuit Breaker" SB_0603 1509,35.7 r90 bottom
SB167 "Circuit Breaker" SB_0603 1621.75,-197.5 r90 bottom
SB168 "Circuit Breaker" SB_0603 1681,-197.5 r270 bottom
SB169 "Circuit Breaker" SB_0603 242,-300 r0 bottom
SB170 "Circuit Breaker" SB_0603 242,-400 r180 bottom
SB171 "Circuit Breaker" SB_0603 1622,-315.25 r90 bottom
SB172 "Circuit Breaker" SB_0603 1681,-315.25 r270 bottom
SB173 "Closed" SB_0603 242,-500 r0 bottom
SB174 "Circuit Breaker" SB_0603 1622,-433.25 r90 bottom
SB175 "Circuit Breaker" SB_0603 1681,-433 r270 bottom
SB176 "Circuit Breaker" SB_0603 243,-600 r0 bottom
SB177 "Closed" SB_0603 765,-642 r180 bottom
SB178 "Closed" SB_0603 1647,-613 r180 bottom
SB179 "Closed" SB_0603 1647,-672 r180 bottom
SB180 "Open" SB_0603 1529,-672 r180 bottom
SB181 "Closed" SB_0603 1647,-755 r180 bottom
SB182 "Closed" SB_0603 -8,-1500 r180 bottom
SB183 "Closed" SB_0603 -8,-1600 r180 bottom
SB184 "Closed" SB_0603 579,-1752.94 r270 bottom
SB185 "Closed" SB_0603 638,-1753 r90 bottom
SB186 "Closed" SB_0603 236,-1752.94 r90 bottom locked
SB187 "Closed" SB_0603 151,-1752.94 r90 bottom
T1 "9013" SOT-23 1736,2731 r0 top locked
T2 "9013" SOT-23 619.01,-1749 r0 top
TP1 "USB_SOF" TP 522,1361 r0 top
U1 "USBLC6-2SC6" SOT23-6L 1513,2714 r270 top
U2 "STM32F103CBT6" LQFP48_0R5_7x7 950,2450 r270 top locked
U3 "LD3985M33R" SOT-23-5L 1585,2371 r0 top locked
U4 "ST890CDR" SOIC8_1R27_4R9X6 1933,2209 r0 top locked
U5 "LD1117S50TR" SOT-223 510,1711 r0 top
U6 "LD39050PU33R" DFN6_0R95_3x3_TP 1417,1504 r180 top
U7 "TSV631AILT" SOT-23-5L 1559.5,1506 r90 top
U8 "MCU_LQFP144" LQFP144_0R5_SKT 954,600 r0 top locked
U9 "LAN8742A-CZ-TR" QFN24_0R5_4X4 950,-674.31 r180 top
U10 "USBLC6-4SC6" SOT23-6L 930.32,-899 r180 top
U11 "KMS-1102NL" Transformer 1197,-1298 r180 top locked
U12 "STMPS2151STR" SOT-23-5L 785,-1892 r90 top
X1 "NX3225GD-8.000M-EXS00A-CG04874" OSC_2SM_3R2x2R5 642,2470 r90 top
X2 "NX3215SA-32.768KHZ-EXS00A-MU00525" XTAL_2SM_3R2X1R5 758,-65 r180 top
X3 "NX3225GD-8.000M-EXS00A-CG04874[N/A]" OSC_2SM_3R2x2R5 1053,-88 r180 top
X4 "X53T-C20SSA-25.000MHz" XTAL_2SM_5R0X3R2 1342,-657 r270 top

## Footprints (in the part's own frame and the unit in brackets; to place one, negate y for a bottom-side part, rotate by r counter-clockwise, add the part's x,y. Pads: shape width x height; smd on the part's side, far side on the other; paste and mask are expansions set on the pad)
0603C [mm] "Chip Capacitor, Body 1.6x0.8mm, Height 1.0mm, IPC Medium Density"
  rect 0.9x1 smd: 1(-0.8,0) 2(0.8,0)
  silkscreen extent -0.05,-0.4 0.05,0.4, body extent -0.87,-0.48 0.88,0.47, height 1
0603D-B [mm] "LED, SMT, Body 1.6 x 0.8 mm, 0.25mm Thickness"
  rect 1x1 smd paste+0 mask+0: 1(0.85,0) 2(-0.85,0)
  silkscreen extent -1.99,-0.85 1.6,0.85, body extent -0.8,-0.4 0.8,0.4, height 0.25
0603D-G [mm] "LED, SMT, Body 1.6 x 0.8 mm, 0.25mm Thickness"
  rect 1x1 smd paste+0 mask+0: 1(0.85,0) 2(-0.85,0)
  silkscreen extent -1.99,-0.84 1.6,0.86, body extent -0.8,-0.4 0.8,0.4, height 0.25
0603D-R [mm] "LED, SMT, Body 1.6 x 0.8 mm, 0.25mm Thickness"
  rect 1x1 smd paste+0 mask+0: 1(0.85,0) 2(-0.85,0)
  silkscreen extent -1.98,-0.86 1.6,0.84, body extent -0.8,-0.4 0.8,0.4, height 0.25
0603L [mil] "Bead 0603L"
  rect 30x30 smd: 1(27.5,0) 2(-27.5,0)
  silkscreen extent -2,-16 2,16, body extent -34,-19 34,19, height 24
0603R [mm] "Chip Resistor, Body 1.6x0.8mm, IPC Medium Density"
  rect 0.9x1 smd: 1(-0.8,0) 2(0.8,0)
  silkscreen extent -0.05,-0.4 0.05,0.4, body extent -0.85,-0.47 0.85,0.47, height 0.6
1206C [mm] "Chip Capacitor, Body 3.2x1.6mm, Height 1mm, IPC Medium Density"
  rect 1.15x1.8 smd: 1(-1.5,0) 2(1.5,0)
  silkscreen extent -0.55,-0.8 0.55,0.8, body extent -1.7,-0.9 1.7,0.9, height 1
DFN6_0R95_3x3_TP [mm] "500 mA low quiescent current and low noise voltage regulator"
  rect 2x1.2 smd: 0(0,0)
  rect 0.45x0.5 smd: 1(-0.95,-1.3) 2(0,-1.3) 3(0.95,-1.3) 4(0.95,1.3) 5(0,1.3) 6(-0.95,1.3)
  silkscreen extent -1.71,-1.33 1.5,1.3, body extent -1.5,-1.5 1.5,1.5, height 1
HDR_1x2_2R54_V_M [mm] "Male Header, Pitch 2.54mm, 4x1 Position, Mated Height 6mm, Tail Length 10mm"
  rect 1.5x1.5 hole 1.02: 1(0,0)
  round 1.5 hole 1.02: 2(2.54,0)
  silkscreen extent -1.88,-1.27 3.81,1.27, body extent -1.27,-1.27 3.81,1.27, height 9
HDR_1x2_2R54_V_M_S [mm] "Male Header, Pitch 2.54mm, 4x1 Position, Mated Height 6mm, Tail Length 3mm"
  rect 1.5x1.5 hole 1.02: 1(0,0)
  round 1.5 hole 1.02: 2(2.54,0)
  silkscreen extent -1.27,-2.21 3.81,1.27, body extent -1.27,-1.27 3.81,1.27, height 9
HDR_1x4_2R54_V_M [mm] "Male Header, Pitch 2.54mm, 4x1 Position, Mated Height 6mm, Tail Length 3mm"
  rect 1.5x1.5 hole 1.02: 1(0,0)
  round 1.5 hole 1.02: 2(2.54,0) 3(5.08,0) 4(7.62,0)
  silkscreen extent -2.08,-1.27 8.89,1.27, body extent -1.27,-1.27 8.89,1.27, height 9
HDR_1x6_2R54_V_M [mm] "Male Header, Pitch 2.54mm, 6x1 Position, Mated Height 6mm, Tail Length 3mm"
  rect 1.5x1.5 hole 1.02: 1(0,0)
  round 1.5 hole 1.02: 2(2.54,0) 3(5.08,0) 4(7.62,0) 5(10.16,0) 6(12.7,0)
  silkscreen extent -1.27,-2.06 13.97,1.27, body extent -1.27,-1.27 13.97,1.27, height 9
HDR_2x36_2R54_V_M [mm] "Male Header, Pitch 2.54mm, 36x2 Position, Mated Height 6mm, Tail Length 3mm"
  rect 1.5x1.8 hole 1.02: 1(0,0)
  oval 1.5x1.8 hole 1.02: 2(0,2.54) 3(2.54,0) 4(2.54,2.54) 5(5.08,0) 6(5.08,2.54) 7(7.62,0) 8(7.62,2.54) 9(10.16,0) 10(10.16,2.54) 11(12.7,0) 12(12.7,2.54) 13(15.24,0) 14(15.24,2.54) 15(17.78,0) 16(17.78,2.54) 17(20.32,0) 18(20.32,2.54) 19(22.86,0) 20(22.86,2.54) 21(25.4,0) 22(25.4,2.54) 23(27.94,0) 24(27.94,2.54) 25(30.48,0) 26(30.48,2.54) 27(33.02,0) 28(33.02,2.54) 29(35.56,0) 30(35.56,2.54) 31(38.1,0) 32(38.1,2.54) 33(40.64,0) 34(40.64,2.54) 35(43.18,0) 36(43.18,2.54) 37(45.72,0) 38(45.72,2.54) 39(48.26,0) 40(48.26,2.54) 41(50.8,0) 42(50.8,2.54) 43(53.34,0) 44(53.34,2.54) 45(55.88,0) 46(55.88,2.54) 47(58.42,0) 48(58.42,2.54) 49(60.96,0) 50(60.96,2.54) 51(63.5,0) 52(63.5,2.54) 53(66.04,0) 54(66.04,2.54) 55(68.58,0) 56(68.58,2.54) 57(71.12,0) 58(71.12,2.54) 59(73.66,0) 60(73.66,2.54) 61(76.2,0) 62(76.2,2.54) 63(78.74,0) 64(78.74,2.54) 65(81.28,0) 66(81.28,2.54) 67(83.82,0) 68(83.82,2.54) 69(86.36,0) 70(86.36,2.54) 71(88.9,0) 72(88.9,2.54)
  silkscreen extent -1.27,-2.03 90.17,3.81, body extent -1.27,-1.27 90.17,3.81, height 9
HDR_3x2_2R54_V_M [mm] "Male Header, Pitch 2.54mm, 2x3 Position, Mated Height 6mm, Tail Length 3mm"
  rect 1.5x1.5 hole 1.02: 1(0,0)
  round 1.5 hole 1.02: 2(0,2.54) 3(2.54,0) 4(2.54,2.54) 5(5.08,0) 6(5.08,2.54)
  silkscreen extent -1.27,-1.89 6.35,3.81, body extent -1.27,-1.27 6.35,3.81, height 9
HDR_8x2_2R54_V_F [mm] "Female Header, Pitch 2.54mm, 2x8 Position, Mated Height 6mm, Tail Length 3mm"
  rect 1.5x1.8 hole 1.02: 1(0,0)
  oval 1.5x1.8 hole 1.02: 2(0,2.54) 3(2.54,0) 4(2.54,2.54) 5(5.08,0) 6(5.08,2.54) 7(7.62,0) 8(7.62,2.54) 9(10.16,0) 10(10.16,2.54) 11(12.7,0) 12(12.7,2.54) 13(15.24,0) 14(15.24,2.54) 15(17.78,0) 16(17.78,2.54)
  silkscreen extent -1.96,-1.27 19.05,3.81, body extent -1.27,-1.27 19.05,3.81, height 8.64
HDR_10x2_2R54_V_F [mm] "Female Header, Pitch 2.54mm, 2x8 Position, Mated Height 6mm, Tail Length 3mm"
  rect 1.5x1.8 hole 1.02: 1(0,0)
  oval 1.5x1.8 hole 1.02: 2(0,2.54) 3(2.54,0) 4(2.54,2.54) 5(5.08,0) 6(5.08,2.54) 7(7.62,0) 8(7.62,2.54) 9(10.16,0) 10(10.16,2.54) 11(12.7,0) 12(12.7,2.54) 13(15.24,0) 14(15.24,2.54) 15(17.78,0) 16(17.78,2.54) 17(20.32,0) 18(20.32,2.54) 19(22.86,0) 20(22.86,2.54)
  silkscreen extent -1.27,-2.09 24.13,3.81, body extent -1.27,-1.27 24.13,3.81, height 8.64
HDR_15x2_2R54_V_F [mm] "Female Header, Pitch 2.54mm, 2x15 Position, Mated Height 6mm, Tail Length 3mm"
  rect 1.5x1.8 hole 1.02: 1(0,0)
  oval 1.5x1.8 hole 1.02: 2(0,2.54) 3(2.54,0) 4(2.54,2.54) 5(5.08,0) 6(5.08,2.54) 7(7.62,0) 8(7.62,2.54) 9(10.16,0) 10(10.16,2.54) 11(12.7,0) 12(12.7,2.54) 13(15.24,0) 14(15.24,2.54) 15(17.78,0) 16(17.78,2.54) 17(20.32,0) 18(20.32,2.54) 19(22.86,0) 20(22.86,2.54) 21(25.4,0) 22(25.4,2.54) 23(27.94,0) 24(27.94,2.54) 25(30.48,0) 26(30.48,2.54) 27(33.02,0) 28(33.02,2.54) 29(35.56,0) 30(35.56,2.54)
  silkscreen extent -2.01,-1.27 36.83,3.81, body extent -1.27,-1.27 36.83,3.81, height 8.64
HDR_17x2_2R54_V_F [mm] "Female Header, Pitch 2.54mm, 2x17 Position, Mated Height 6mm, Tail Length 3mm"
  rect 1.5x1.8 hole 1.02: 1(0,0)
  oval 1.5x1.8 hole 1.02: 2(0,2.54) 3(2.54,0) 4(2.54,2.54) 5(5.08,0) 6(5.08,2.54) 7(7.62,0) 8(7.62,2.54) 9(10.16,0) 10(10.16,2.54) 11(12.7,0) 12(12.7,2.54) 13(15.24,0) 14(15.24,2.54) 15(17.78,0) 16(17.78,2.54) 17(20.32,0) 18(20.32,2.54) 19(22.86,0) 20(22.86,2.54) 21(25.4,0) 22(25.4,2.54) 23(27.94,0) 24(27.94,2.54) 25(30.48,0) 26(30.48,2.54) 27(33.02,0) 28(33.02,2.54) 29(35.56,0) 30(35.56,2.54) 31(38.1,0) 32(38.1,2.54) 33(40.64,0) 34(40.64,2.54)
  silkscreen extent -1.98,-1.27 41.91,3.81, body extent -1.27,-1.27 41.91,3.81, height 8.64
HSMF-A201 [mm] "LED"
  rect 1.5x1.1 smd: 1(-1.5,0.75) 2(1.5,0.75) 3(1.5,-0.75) 4(-1.5,-0.75)
  silkscreen extent -2.89,-1.55 1.75,1.55, body extent -1.6,-1.4 1.6,1.4, height 1.2
LQFP48_0R5_7x7 [mm] "Low & medium-density value line, advanced ARM-based 32-bit MCU"
  rect 0.2x1 smd: 1(-2.75,-4.25) 2(-2.25,-4.25) 3(-1.75,-4.25) 4(-1.25,-4.25) 5(-0.75,-4.25) 6(-0.25,-4.25) 7(0.25,-4.25) 8(0.75,-4.25) 9(1.25,-4.25) 10(1.75,-4.25) 11(2.25,-4.25) 12(2.75,-4.25) 25(2.75,4.25) 26(2.25,4.25) 27(1.75,4.25) 28(1.25,4.25) 29(0.75,4.25) 30(0.25,4.25) 31(-0.25,4.25) 32(-0.75,4.25) 33(-1.25,4.25) 34(-1.75,4.25) 35(-2.25,4.25) 36(-2.75,4.25)
  rect 1x0.2 smd: 13(4.25,-2.75) 14(4.25,-2.25) 15(4.25,-1.75) 16(4.25,-1.25) 17(4.25,-0.75) 18(4.25,-0.25) 19(4.25,0.25) 20(4.25,0.75) 21(4.25,1.25) 22(4.25,1.75) 23(4.25,2.25) 24(4.25,2.75) 37(-4.25,2.75) 38(-4.25,2.25) 39(-4.25,1.75) 40(-4.25,1.25) 41(-4.25,0.75) 42(-4.25,0.25) 43(-4.25,-0.25) 44(-4.25,-0.75) 45(-4.25,-1.25) 46(-4.25,-1.75) 47(-4.25,-2.25) 48(-4.25,-2.75)
  silkscreen extent -3.81,-5.52 3.81,3.81, body extent -3.5,-3.5 3.5,3.5, height 1.6
LQFP144_0R5_SKT [mm] "32-bit MCU ARM-based Cortex-M3 20 X 20mm, 0.5mm Pitch, 1.6mm Max thickness"
  rect 1x2.5 smd rot 45: 0(-10.96,-10.96) 0(10.96,10.96)
  rect 1x2.5 smd rot 135: 0(-10.96,10.96) 0(10.96,-10.96)
  round 1.5 hole 1.5 unplated: 0(0,-8) 0(0,8)
  rect 0.3x1.65 smd: 1(-8.75,-10.625) 2(-8.25,-10.625) 3(-7.75,-10.625) 4(-7.25,-10.625) 5(-6.75,-10.625) 6(-6.25,-10.625) 7(-5.75,-10.625) 8(-5.25,-10.625) 9(-4.75,-10.625) 10(-4.25,-10.625) 11(-3.75,-10.625) 12(-3.25,-10.625) 13(-2.75,-10.625) 14(-2.25,-10.625) 15(-1.75,-10.625) 16(-1.25,-10.625) 17(-0.75,-10.625) 18(-0.25,-10.625) 19(0.25,-10.625) 20(0.75,-10.625) 21(1.25,-10.625) 22(1.75,-10.625) 23(2.25,-10.625) 24(2.75,-10.625) 25(3.25,-10.625) 26(3.75,-10.625) 27(4.25,-10.625) 28(4.75,-10.625) 29(5.25,-10.625) 30(5.75,-10.625) 31(6.25,-10.625) 32(6.75,-10.625) 33(7.25,-10.625) 34(7.75,-10.625) 35(8.25,-10.625) 36(8.75,-10.625) 73(8.75,10.625) 74(8.25,10.625) 75(7.75,10.625) 76(7.25,10.625) 77(6.75,10.625) 78(6.25,10.625) 79(5.75,10.625) 80(5.25,10.625) 81(4.75,10.625) 82(4.25,10.625) 83(3.75,10.625) 84(3.25,10.625) 85(2.75,10.625) 86(2.25,10.625) 87(1.75,10.625) 88(1.25,10.625) 89(0.75,10.625) 90(0.25,10.625) 91(-0.25,10.625) 92(-0.75,10.625) 93(-1.25,10.625) 94(-1.75,10.625) 95(-2.25,10.625) 96(-2.75,10.625) 97(-3.25,10.625) 98(-3.75,10.625) 99(-4.25,10.625) 100(-4.75,10.625) 101(-5.25,10.625) 102(-5.75,10.625) 103(-6.25,10.625) 104(-6.75,10.625) 105(-7.25,10.625) 106(-7.75,10.625) 107(-8.25,10.625) 108(-8.75,10.625)
  rect 1.65x0.3 smd: 37(10.625,-8.75) 38(10.625,-8.25) 39(10.625,-7.75) 40(10.625,-7.25) 41(10.625,-6.75) 42(10.625,-6.25) 43(10.625,-5.75) 44(10.625,-5.25) 45(10.625,-4.75) 46(10.625,-4.25) 47(10.625,-3.75) 48(10.625,-3.25) 49(10.625,-2.75) 50(10.625,-2.25) 51(10.625,-1.75) 52(10.625,-1.25) 53(10.625,-0.75) 54(10.625,-0.25) 55(10.625,0.25) 56(10.625,0.75) 57(10.625,1.25) 58(10.625,1.75) 59(10.625,2.25) 60(10.625,2.75) 61(10.625,3.25) 62(10.625,3.75) 63(10.625,4.25) 64(10.625,4.75) 65(10.625,5.25) 66(10.625,5.75) 67(10.625,6.25) 68(10.625,6.75) 69(10.625,7.25) 70(10.625,7.75) 71(10.625,8.25) 72(10.625,8.75) 109(-10.625,8.75) 110(-10.625,8.25) 111(-10.625,7.75) 112(-10.625,7.25) 113(-10.625,6.75) 114(-10.625,6.25) 115(-10.625,5.75) 116(-10.625,5.25) 117(-10.625,4.75) 118(-10.625,4.25) 119(-10.625,3.75) 120(-10.625,3.25) 121(-10.625,2.75) 122(-10.625,2.25) 123(-10.625,1.75) 124(-10.625,1.25) 125(-10.625,0.75) 126(-10.625,0.25) 127(-10.625,-0.25) 128(-10.625,-0.75) 129(-10.625,-1.25) 130(-10.625,-1.75) 131(-10.625,-2.25) 132(-10.625,-2.75) 133(-10.625,-3.25) 134(-10.625,-3.75) 135(-10.625,-4.25) 136(-10.625,-4.75) 137(-10.625,-5.25) 138(-10.625,-5.75) 139(-10.625,-6.25) 140(-10.625,-6.75) 141(-10.625,-7.25) 142(-10.625,-7.75) 143(-10.625,-8.25) 144(-10.625,-8.75)
  silkscreen extent -10,-12.27 10,10, body extent -17.12,-17.12 17.12,17.13, height 14.3
MOLEX_47590001 [mm] "USB Micro-B Connector"
  rect 0.4x1.35 smd: 1(1.3,0) 2(0.65,0) 3(0,0) 4(-0.65,0) 5(-1.3,0)
  oval 1.05x1.25 hole 0.65 slot 0.85 at 90 deg: 6(-2.225,0.325) 10(2.225,0.325)
  rect 1.4x1.9 hole 0.6 slot 1.3 at 90 deg copper offset 0.2,0: 7(-4.2,-2.675)
  rect 2.9x1.9 smd: 8(0,-2.675)
  rect 1.4x1.9 hole 0.6 slot 1.3 at 90 deg copper offset -0.2,0: 9(4.2,-2.675)
  silkscreen extent -4.95,-1.46 4.95,1.25, body extent -4.4,-5.29 4.4,0.44, height 2.71
Molex_1050170001 [mm] "USB Micro-B Connector"
  rect 0.4x1.35 smd: 1(-1.3,0) 2(-0.65,0) 3(0,0) 4(0.65,0) 5(1.3,0)
  round 1.45 hole 0.85: 6(-2.5,0) 11(2.5,0)
  rect 1.8x1.9 hole 0.6 slot 1.3 at 90 deg copper offset 0.3,0: 7(-3.5,-2.7)
  rect 1.5x1.9 smd: 8(-1,-2.7) 9(1,-2.7)
  rect 1.8x1.9 hole 0.6 slot 1.3 at 90 deg copper offset -0.3,0: 10(3.5,-2.7)
  silkscreen extent -3.95,-1.46 3.95,1.37, body extent -4.1,-5.21 4.1,0.19, height 2.58
OSC_2SM_3R2x2R5 [mm] "Crystal 8M Hz 3.2x2.5mm SMD"
  rect 1.5x2.7 smd: 1(-0.95,0) 2(0.95,0)
  body extent -1.6,-1.25 1.6,1.25, height 1
PB-6X6mm-Black [mm] "Surface Mounting Type Tact Switch, 4-Leads, Body 6x6mm, Height 4.5mm Black"
  rect 2.3x1.8 smd: 1(4.325,2.25) 2(4.325,-2.25) 3(-4.325,-2.25) 4(-4.325,2.25)
  silkscreen extent -2.83,-3 2.81,3, body extent -3,-3 3,3, height 10.5
PB-6X6mm-Blue [mm] "Surface Mounting Type Tact Switch, 4-Leads, Body 6x6mm, Height 4.5mm,Blue"
  rect 2.3x1.8 smd: 1(4.325,2.25) 2(4.325,-2.25) 3(-4.325,-2.25) 4(-4.325,2.25)
  silkscreen extent -2.83,-3 2.81,3, body extent -3,-3 3,3, height 10.5
QFN24_0R5_4X4 [mm] "SQFN 24 Pins, Pitch 0.5mm, 4mmx4mm"
  rect 0.69x0.28 smd: 1(-1.9,1.25) 2(-1.9,0.75) 3(-1.9,0.25) 4(-1.9,-0.25) 5(-1.9,-0.75) 6(-1.9,-1.25) 13(1.9,-1.25) 14(1.9,-0.75) 15(1.9,-0.25) 16(1.9,0.25) 17(1.9,0.75) 18(1.9,1.25)
  rect 0.28x0.69 smd: 7(-1.25,-1.9) 8(-0.75,-1.9) 9(-0.25,-1.9) 10(0.25,-1.9) 11(0.75,-1.9) 12(1.25,-1.9) 19(1.25,1.9) 20(0.75,1.9) 21(0.25,1.9) 22(-0.25,1.9) 23(-0.75,1.9) 24(-1.25,1.9)
  rect 2.5x2.5 smd: 25(0,0)
  silkscreen extent -2.46,-2.05 2.05,2.05, body extent -2.05,-2.05 2.05,2.05, height 1
RJ45_KRJ-CB4.2GYZNL [mm] "RJ45  connector, right angle"
  rect 1x1 hole 0.7: 1(3.57,2.65)
  round 1 hole 0.7: 2(2.55,3.75) 3(1.53,2.65) 4(0.51,3.75) 5(-0.51,2.65) 6(-1.53,3.75) 7(-2.55,2.65) 8(-3.57,3.75) 9(7.06,1.57) 10(4.77,1.57) 11(-4.77,1.57) 12(-7.06,1.57)
  oval 1x2.6 hole 0.7 slot 2.2 at 90 deg: 13(8.04,-3.75) 14(-8.04,-3.75)
  body extent -8.1,-11.75 8.08,3.47, height 6.8
SB_0603 [mil] "Jumper"
  rect 32x40 smd: 1(33.75,0) 2(-33.75,0)
  Top Layer region: 23.75,20 13.75,20 -6.25,0 13.75,-20 23.75,-20
  Top Layer region: -26.25,0 -16.25,0 3.75,20 -26.25,20
  Top Layer region: -26.25,0 -16.25,0 3.75,-20 -26.25,-20
SOD-323 [mm] "Diode"
  rect 1.35x0.4 smd: 1(-1.2,0) 2(1.2,0)
  silkscreen extent -1.4,-0.75 1.4,1.24, body extent -1.35,-0.72 1.35,0.72, height 1.17
SOIC8_1R27_4R9X6 [mm] "1.2 A current limited high-side power switch with thermal shutdown"
  rect 2.2x0.6 smd: 1(-2.425,1.905) 2(-2.425,0.635) 3(-2.425,-0.635) 4(-2.425,-1.905) 5(2.425,-1.905) 6(2.425,-0.635) 7(2.425,0.635) 8(2.425,1.905)
  silkscreen extent -2.67,-2.5 0.93,3.08, body extent -2,-2.5 2,2.5, height 1.45
SOT23-6L [mm]
  rect 1.1x0.6 smd: 1(-1.2,0.95) 2(-1.2,0) 3(-1.2,-0.95) 4(1.2,-0.95) 5(1.2,0) 6(1.2,0.95)
  silkscreen extent -1.32,-1.5 0.25,1.92, body extent -0.86,-1.51 0.87,1.52, height 1.25
SOT-23 [mm]
  rect 0.8x0.9 smd: 1(-0.98,-1) 2(0.98,-1) 3(0,1)
  silkscreen extent -2,-1.52 1.5,0.7, body extent -1.52,-0.7 1.52,0.7, height 1.11
SOT-23-5L [mil] "Enhanced single channel power switches"
  rect 30x16 smd: 1(-53.15,37.4) 2(-53.15,0) 3(-53.15,-37.4) 4(53.15,-37.4) 5(53.15,37.4)
  silkscreen extent -33,-58 32,57, body extent -34,-59 34,59, height 57
SOT-223 [mil] "Adjustable and fixed low drop positive voltage regulator"
  rect 80x40 smd: 1(-125,93) 2(-125,0) 3(-125,-93)
  rect 90x120 smd: 4(125,0)
  silkscreen extent -62,-149 48,141, body extent -84,-132 62,132, height 71
TAN-A [mil] "TAN Capacitor"
  rect 50x60 smd: 1(55,0) 2(-55,0)
  silkscreen extent -95,-45 95,80, body extent -47,-35 47,35, height 39
TAN-B [mm] "Tan Capacitor"
  rect 1.5x2.8 smd: 1(1.55,0) 2(-1.55,0)
  silkscreen extent -2.79,-1.9 3.56,1.91, body extent -1.76,-1.54 1.7,1.54, height 1
TP [mm] "Testpoint, Surface Mounting, Circular, Pad Diameter 1mm"
  round 1 smd: 1(0,0)
Transformer [mm]
  rect 0.64x1.4 smd: 1(-4.445,-4.51) 2(-3.175,-4.51) 3(-1.905,-4.51) 4(-0.635,-4.51) 5(0.635,-4.51) 6(1.905,-4.51) 7(3.175,-4.51) 8(4.445,-4.51) 9(4.445,4.51) 10(3.175,4.51) 11(1.905,4.51) 12(0.635,4.51) 13(-0.635,4.51) 14(-1.905,4.51) 15(-3.175,4.51) 16(-4.445,4.51)
  silkscreen extent -4.57,-6.09 -4.32,-5.84, body extent -6.4,-3 6.4,3, height 6
XTAL_2SM_3R2X1R5 [mm] "CRYSTAL 32.768KHZ 6PF SMD 2 pads"
  rect 1x1.8 smd: 1(-1.25,0) 2(1.25,0)
  silkscreen extent -0.28,-0.91 0.28,0.91, body extent -1.63,-0.75 1.58,0.75, height 0.89
XTAL_2SM_5R0X3R2 [mm] "CRYSTAL 25M Hz  30F SMD 2 pads"
  rect 1.8x2.2 smd: 1(-1.9,0) 2(1.9,0)
  silkscreen extent -0.4,-1.27 0.4,1.27, body extent -2.5,-1.6 2.5,1.6, height 1.3

## Part data
B1 B2: library part "SW PUSHBUTTON", "SE PUSHBUTTON"
C1 C2 C3 C4 C5 C6 C7 C8 C10 C11 C12 C13 C19 C22 C40 C42 C43 C44 C45 C47 C48 C49 C50: library part Capacitor_ST, "Capacitor 0402 / 0603 / 0805"
C9 C14 C20 C23 C41 C57: library part "CAP SMD 0603  X5R 1µF 25V 10%", "0603  X5R 1µ"
C15: library part "CAP SMD 0603  X7R 10000PF 50V 10%", "0603  X7R 10NF"
C16 C17 C18 C54: library part "Cap Pol1", "Polarized Capacitor (Radial)"
C21: library part "CAP SMD 0603  X5R 1µF 25V 10%", "0603  X5R 4.7uF"
C24 C25 C26 C27 C28 C29 C30 C31 C32 C33 C34 C39 C58: library part Cap, "Capacitor"
C35 C36 C37 C38 C52 C53: library part CAP, "Capacitor"
C46: library part Cap_10uF_POL_10%_TANA, "Polarized Capacitor,10uF,10V,10%,typeA,VISHAY"
C51: library part Capacitor_ST, "Capacitor 0402 / 0603 / 0805/ 1206"
C55 C56: library part Cap_2.2uF_X7R_10%_0805, "Capacitor,2.2uF,16V, X7R,10%,0805,YAGEO"
CN2 CN3 CN5 JP1 JP2 JP4 JP5 JP6 JP7: library part JP2
CN4: "Header, 4-Pin, Single row"
CN6: "Header, 6-Pin, Single row"
CN7: "Header, 10-Pin, Dual row,female"
CN8: "Header, 8-Pin, Dual row,female"
CN9: "Header, 15-Pin, Dual row,female"
CN10: "Header, 17-Pin, Dual row,female"
CN11 CN12: "Header, 36-Pin, Dual row"
CN14: "100 Base-TX (Fast Ethernet) SMD RJ45 single port (1x1) with LEDS Integrated Magnetics Connector"
D2: library part Diode, "Default Diode"
D6: "4-line ESD protection"
JP3: "Header, 3-Pin, Dual row"
L1 L2: library part Inductor, "Inductor"
LD1 LD2 LD3 LD5 LD6 LD7 LD8: library part LED2, "Typical RED, GREEN, YELLOW, AMBER GaAs LED"
LD4: "Bicolor Led"
R1 R2 R3 R4 R5 R6 R9 R10 R11 R13 R14 R15 R17 R19 R20 R22 R23 R24 R25 R26 R27 R28 R29 R35 R39 R41 R43 R44 R47 R65 R66 R67 R70: library part Resistor_ST, "Resistor 0402 / 0603 / 0805"
R7 R8 R12 R16 R18 R21 R30 R31 R32 R37 R38 R59 R60 R61 R72: library part Res1, "Resistor"
R33 R34 R36 R58 R62 R63 R64 R68 R69 R71 R73: library part res1, "Resistor"
R40 R42 R45 R48: library part Res_33_1%_0402, "Resistor,33,0402,1%,YAGEO"
R46: library part Res_1K5_1%_0402, "Resistor,1K5,0402,1%,YAGEO"
R49: library part Res_12K1_1%_0603, "Resistor,12K1,0603,1%,VISHAY"
R50 R51 R52 R53: library part Res_50_1%_0603, "Resistor,50,0603,1%,YAGEO"
R54 R55 R56 R57: library part Res_75_1%_0603, "Resistor,75,0603,1%,YAGEO"
SB1 SB8 SB9 SB16 SB17 SB102 SB104 SB106 SB107 SB109 SB113 SB119 SB122 SB138 SB142 SB143 SB144 SB145 SB148 SB152 SB180: library part "Circuit Breaker", "Circuit Breaker"
SB2 SB3 SB4 SB5 SB6 SB7 SB12 SB13 SB101 SB103 SB105 SB108 SB110 SB111 SB112 SB114 SB116 SB117 SB118 SB120 SB121 SB132 SB133 SB139 SB149 SB155 SB156 SB160 SB162 SB163 SB164 SB173 SB177 SB178 SB179 SB181 SB182 SB183 SB184 SB185 SB186 SB187: library part "Circuit Breaker_close", "Circuit Breaker"
T1 T2: library part NPN, "NPN Bipolar Transistor"
TP1: library part TP
U2: "Medium-density performance line ARM-based 32-bit MCU with 64KB Flash"
U3: "Ultra low drop-low noise BiCMOS voltage, regulators low ESR capacitors compatible"
U5: library part LD1117
U6: library part LD39050P
U9: "LAN8742A-CZ-TR - Small Footprint RMII 10/100 Ethernet, Transceiver with HP Auto-MDIX and flexPWR Technology SQFN-24"
U12: library part STMPS2141STR
X1 X3: library part XTAL, "Crystal Oscillator"
X2: library part CRYSTAL_32K, "Crystal"
X4: library part XTAL_5032, "Crystal Oscillator"

## Free pads (board coordinates)
  round 125.98 hole 125.98 unplated: 0(0,1950) 0(50,-1050) 0(1300,-100) 0(1850,-1050) 0(1900,1900)

## Via types
v1: diameter 16, hole 8, Top Layer to Bottom Layer, tented both sides, 464 vias
v2: diameter 15, hole 8, Top Layer to Bottom Layer, tented both sides, 415 vias
v3: diameter 20, hole 12, Top Layer to Bottom Layer, tented both sides, 39 vias
v4: diameter 25.98, hole 12.99, Top Layer to Bottom Layer, tented both sides, 2 vias
v5: diameter 15, hole 8, Top Layer to Bottom Layer, 1 vias

## Nets (pads, with @x,y where several pads share a name; then routed paths per layer and width w, separated by ;. In a path a pad name is that pad's centre, name@x,y a point inside that pad or via, vN(x,y) a via of type N, cw(c..) or ccw(c..) an arc to the next point about the centre after c; other vN are vias at no path point)
+3V3: CN8.7 CN11.16 JP5.1 SB2.1 SB3.2 SB114.1 | length 679.6
  Top Layer w40: JP5.1@1000,1500 1053.75,1553.75 SB2.1@1141,1553.75 SB3.2@1199,1553.75 ; SB3.2@1200,1552.75 v3@1200,1766.66
  Bottom Layer w20: CN11.16@-200,1100 CN8.7@0,1100 ; v3(28,1476) 28.75,1476 32.75,1480 SB114.1@32.75,1518
  other v3: 1201.79,1706 1201.79,1737.22 1201.79,1768.45
+3V3_PER: C40.2 L2.2 R25.1 R39.1 R43.1 R44.1 R46.2 R47.1 R61.2 R64.2 R71.1 SB2.2 SB113.1 U7.5 U9.9 | length 4437.5
  Top Layer w10: R61.2@311,-1721.5 311,-1677 321.4,-1666.6 370.6,-1666.6 v1(372,-1668) ; v2@445,-937 v2(446,-936) L2.2@644.5,-936 L2.2@639.5,-941 ; v2(654,2236.7) R25.1@654,2273.2 ; v2(696,-415.5) R39.1@736,-415.5 ; v1@697.01,-548 R46.2@733.5,-548 R47.1@733.5,-607 ; v2(782.5,-1676) 783.01,-1676.51 R64.2@783.01,-1710.5 ; v2(842,-1882) 842.5,-1882.5 R71.1@886,-1882.5 ; C40.2@914,-469.5 C40.2@914,-478.5 914,-505.5 927.5,-519 v1(941,-519) 959.84,-537.84 U9.9@959.84,-599.51 ; R43.1@1032,-415.5 v2(1032,-370) ; R44.1@1091,-415.5 v2(1091,-370) ; SB2.2@1139.75,1487.5 SB2.2@1141,1486.25 ; U7.5@1522.09,1559.15 v1(1522.09,1595)
  Top Layer w20: v3(1103,1486) 1140.75,1486 SB2.2@1141,1486.25
  Signal w10: v3(339,1948.5) 330.5,1948.5 275,2004 275,2100.94 310.06,2136 621.5,2136 654,2168.5 v2@654,2235 ; v1(372,-1668) 431,-1609 715.5,-1609 v2(782.5,-1676) 842,-1735.5 v2(842,-1882)
  Signal w20: v3(339,1948.5) 982.26,1948.5 1103,1827.76 v3(1103,1486)
  Bottom Layer w10: v3(1103,1486) 1212,1595 v1(1522.09,1595)
  Bottom Layer w20: SB113.1@32.75,1577 32.75,1772.75 208.5,1948.5 v3(339,1948.5)
  other v1: 699.5,-548.5